# Altium PCB base-board_v0.PcbDoc (part 1 of 3)
Units mm, origin at the board's own origin, x right, y up, seen from the top; angles counter-clockwise.
Board outline 82.49 x 71.25 mm, 4 copper layers (1 Top Layer, 2 Signal Layer, 3 GND Layer, 4 Bottom Layer), stack 1.57 mm thick; 189 components, 152 nets, 678 pads, 239 vias.
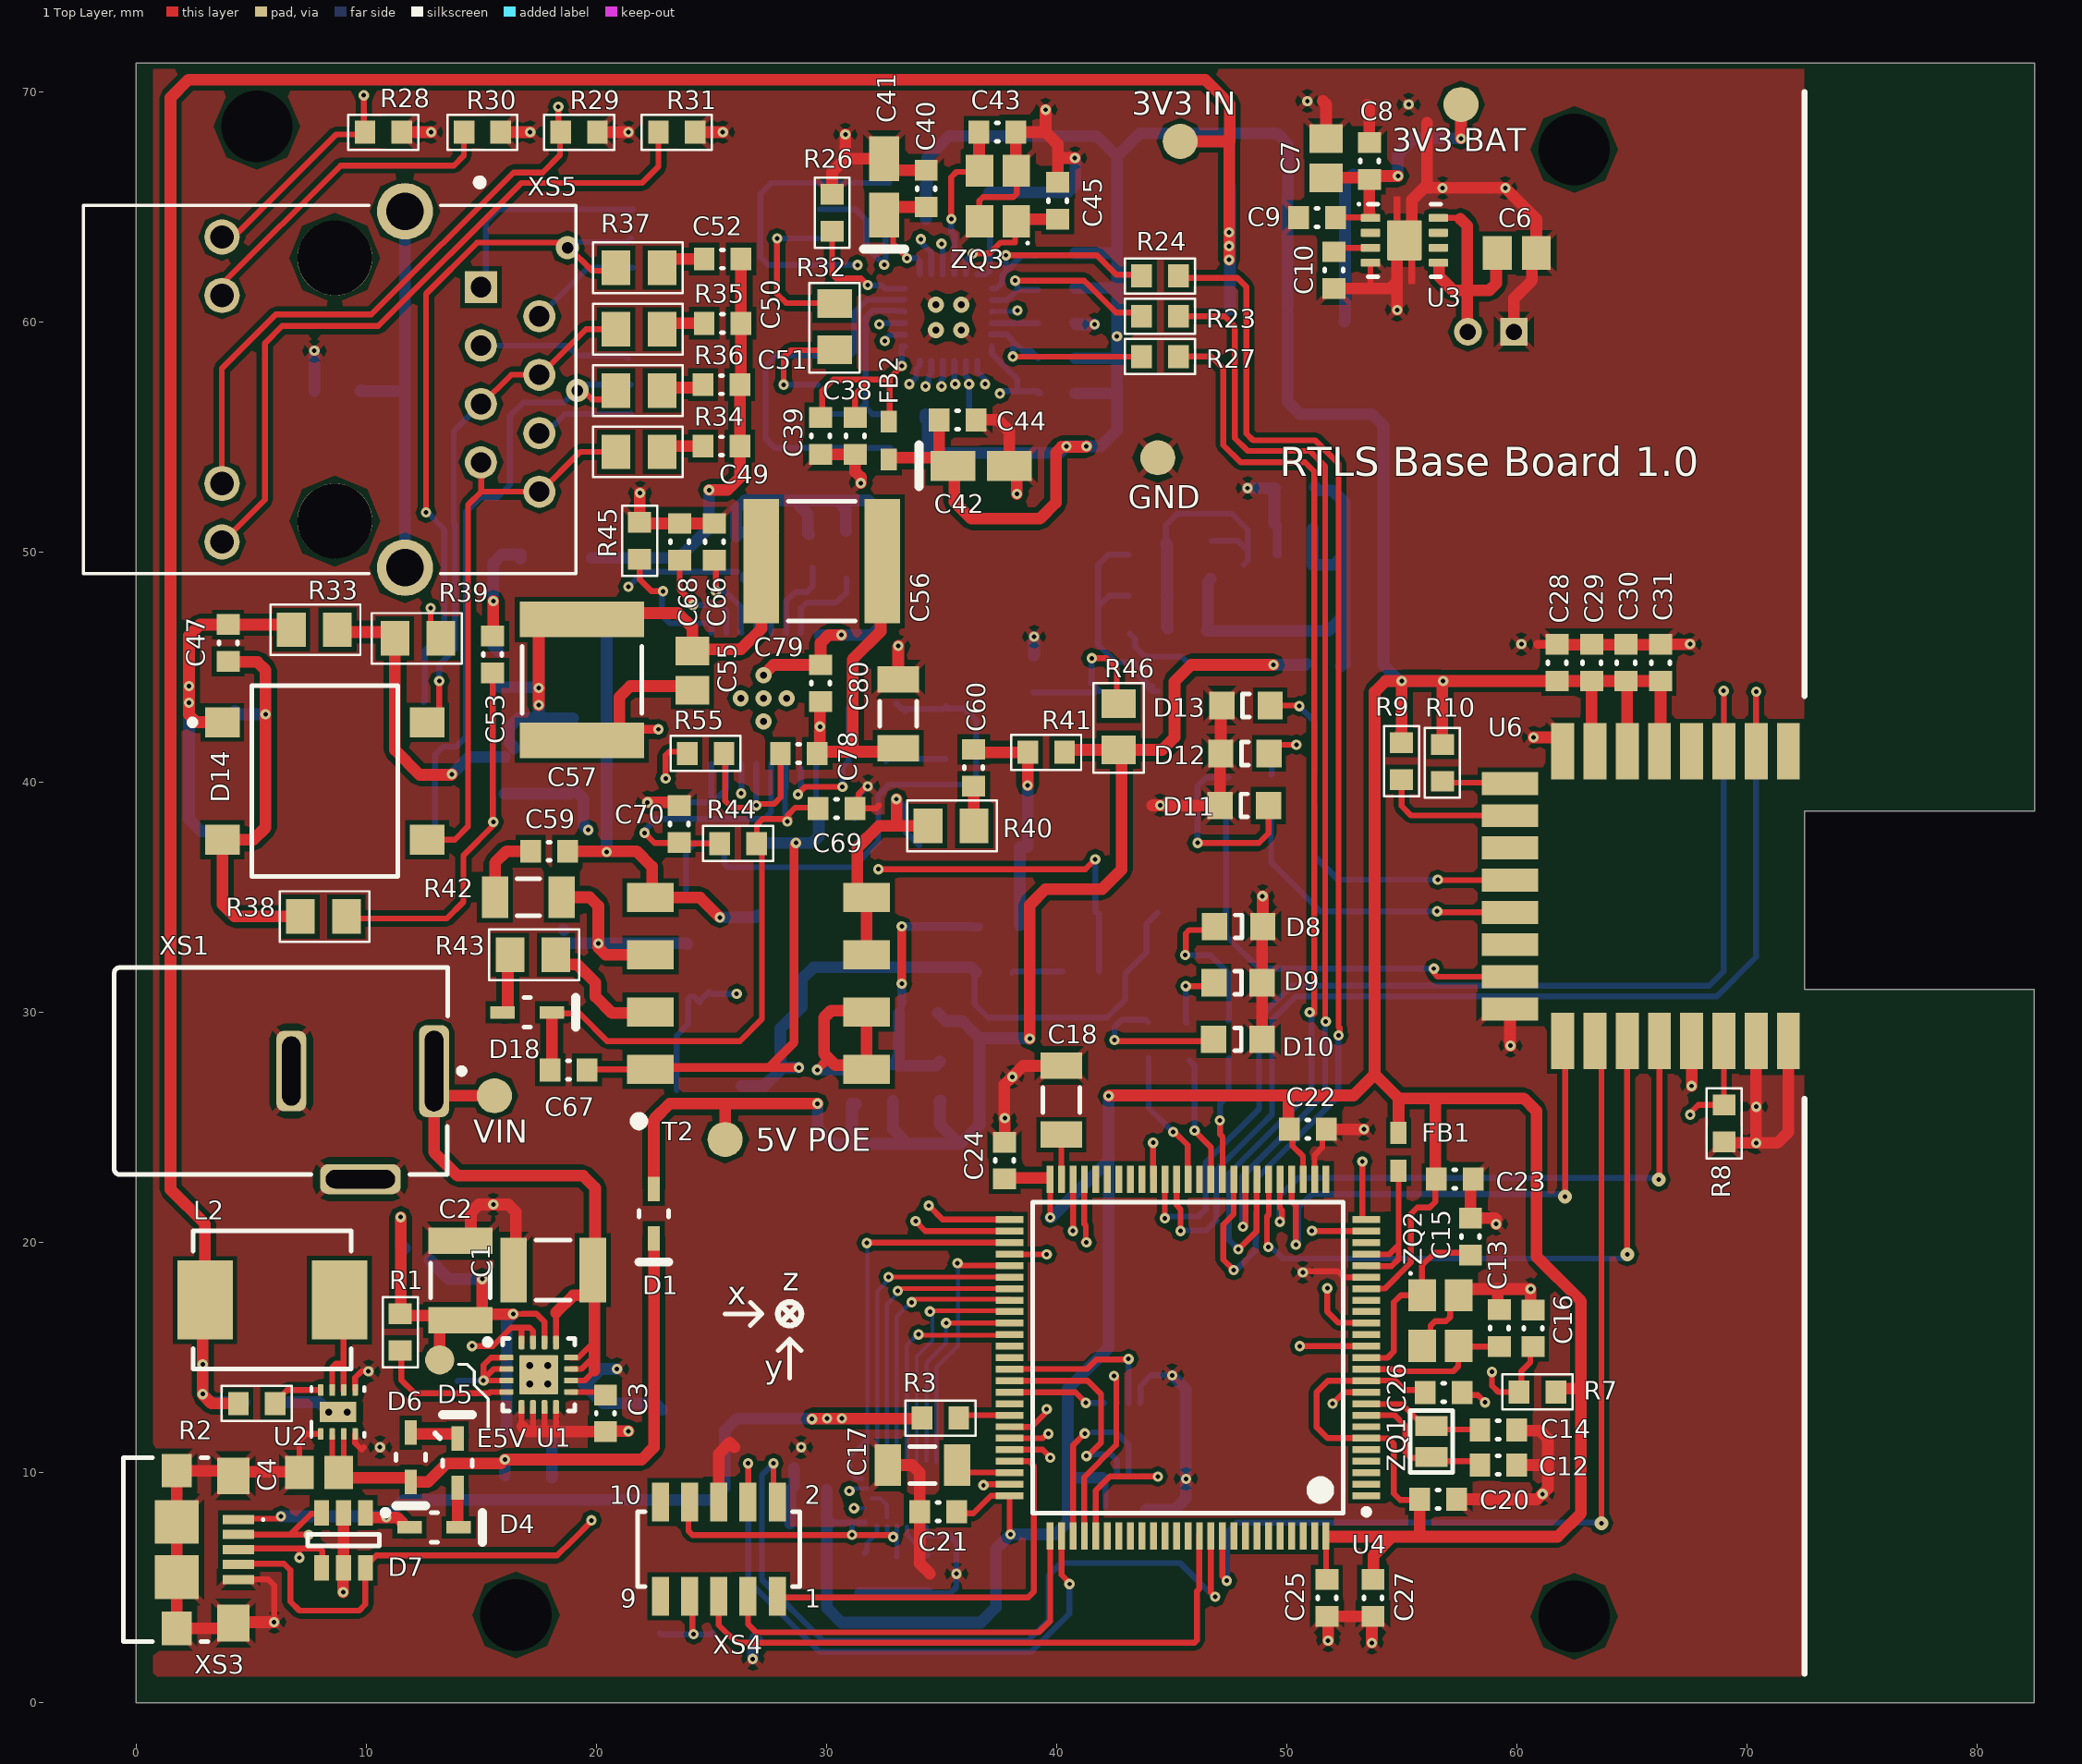
[diagram p0: 1 Top Layer view]
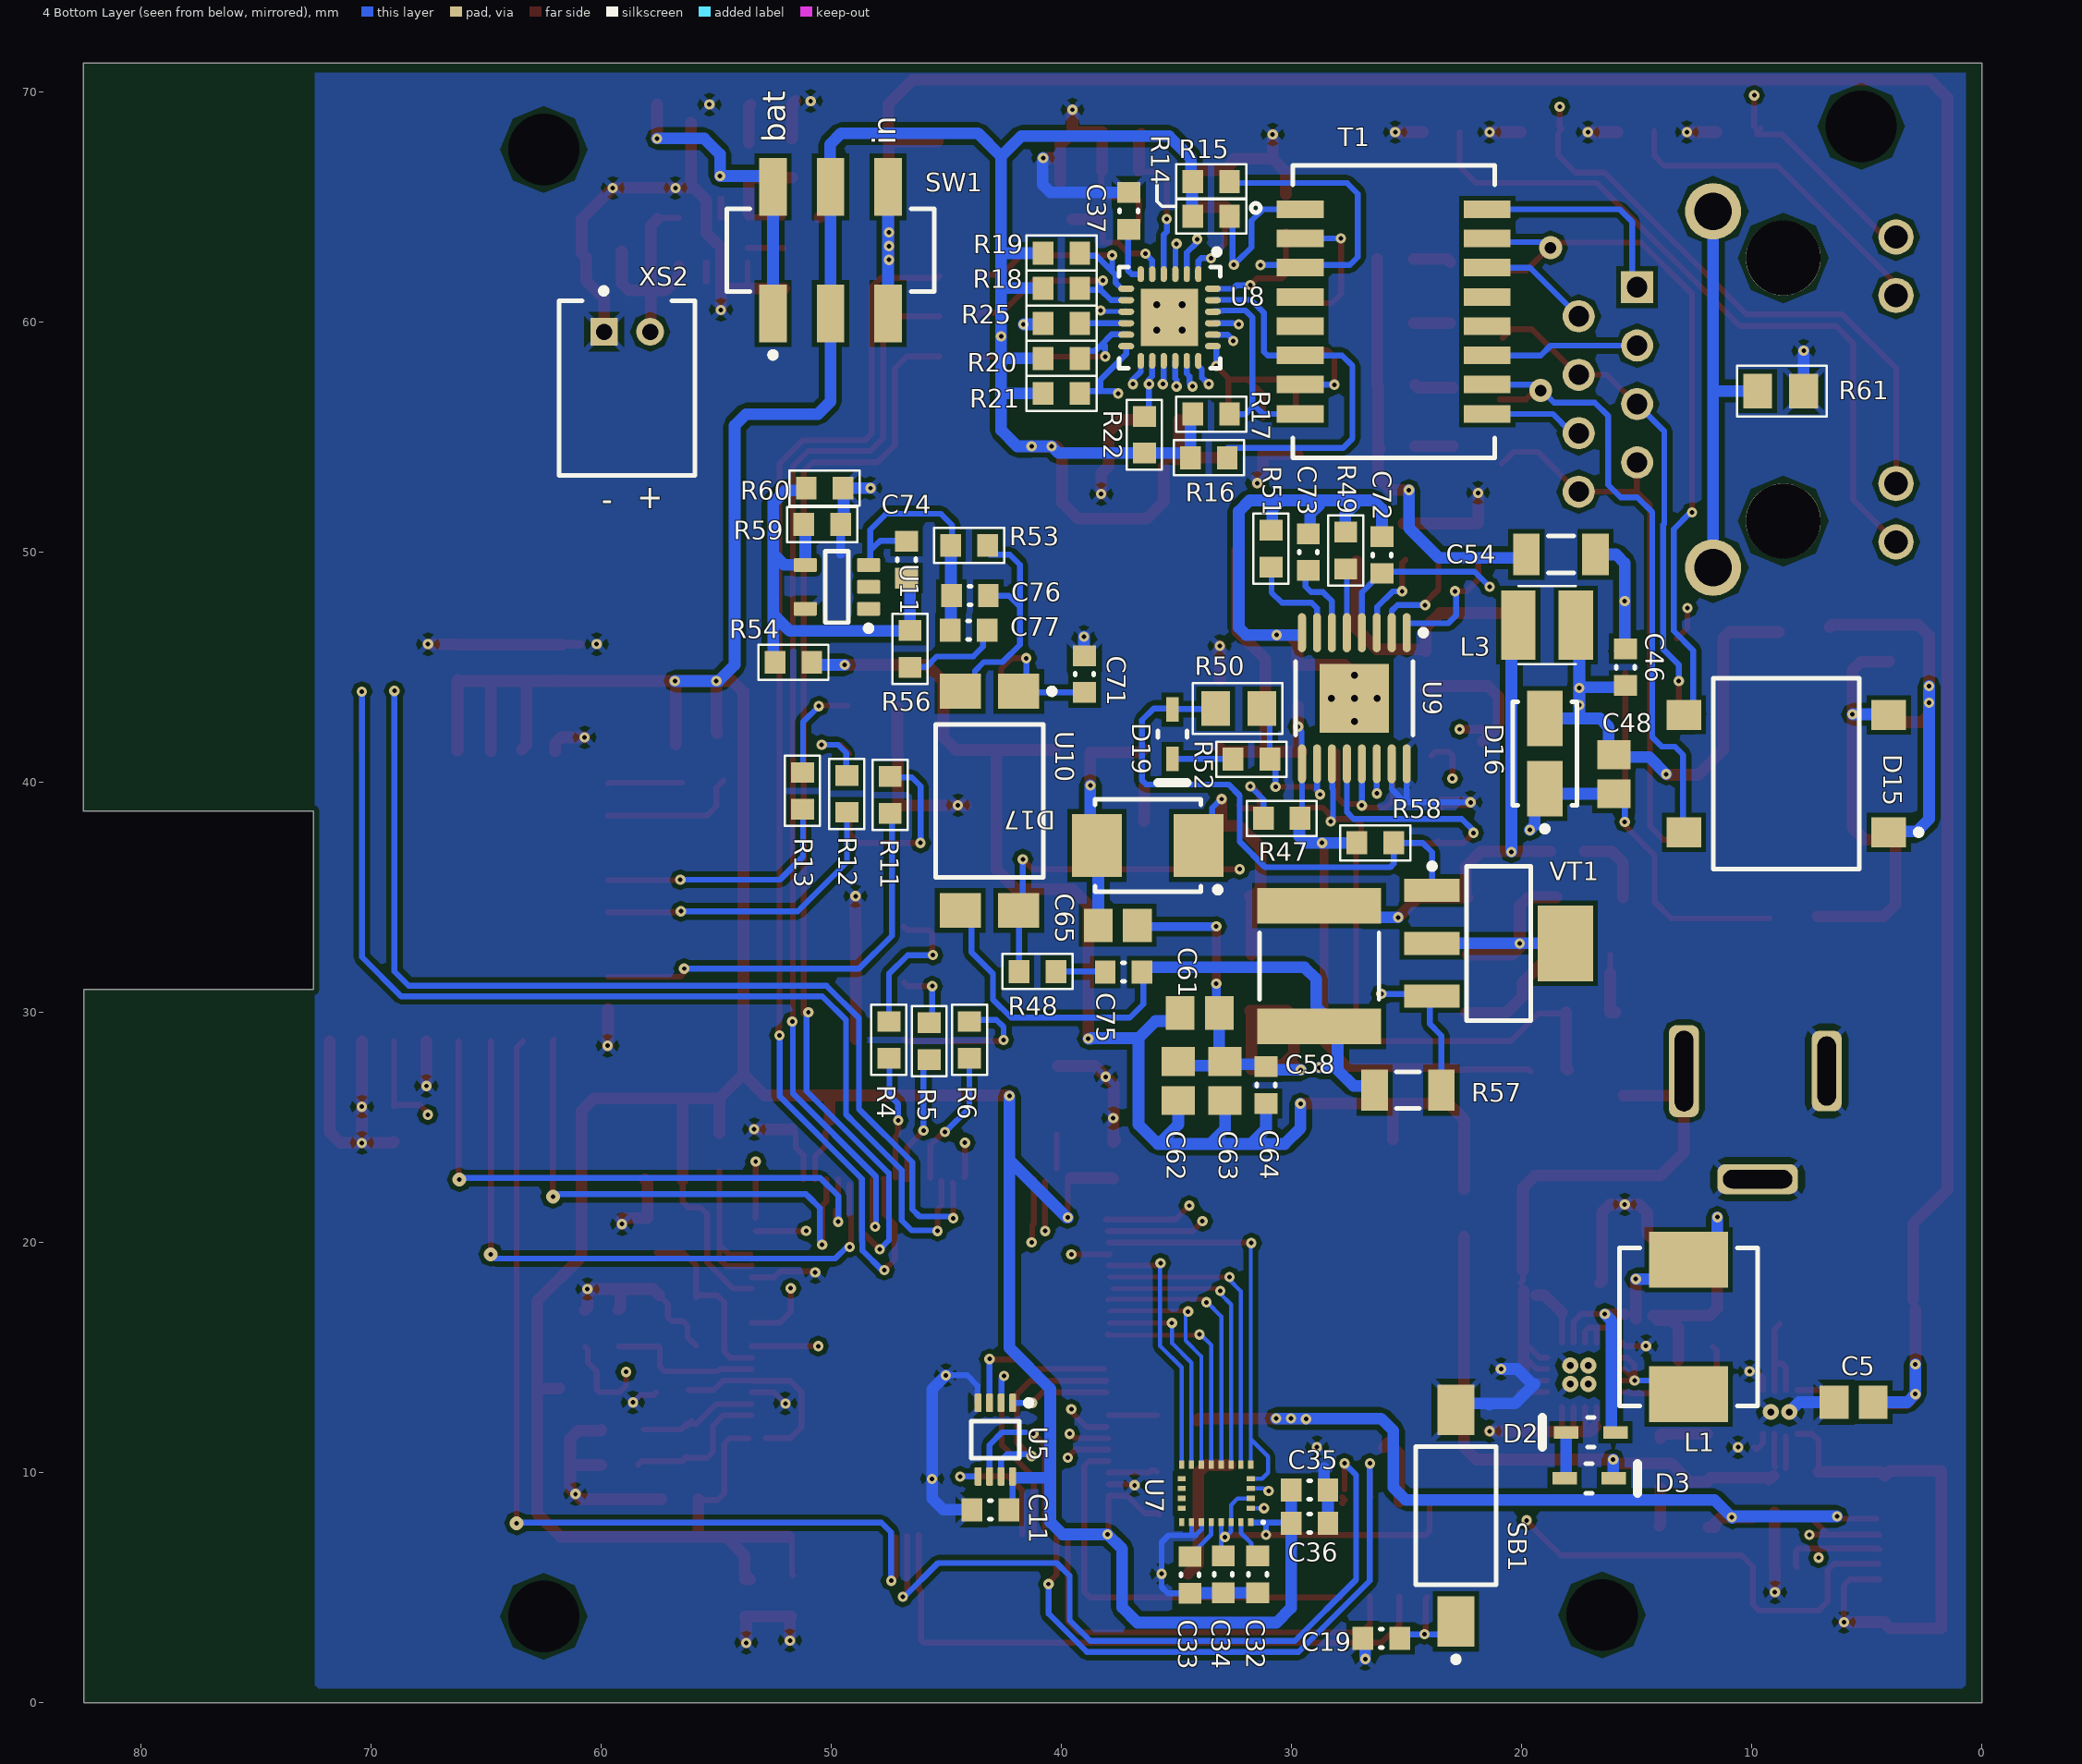
[diagram p1: 4 Bottom Layer view, seen from below]
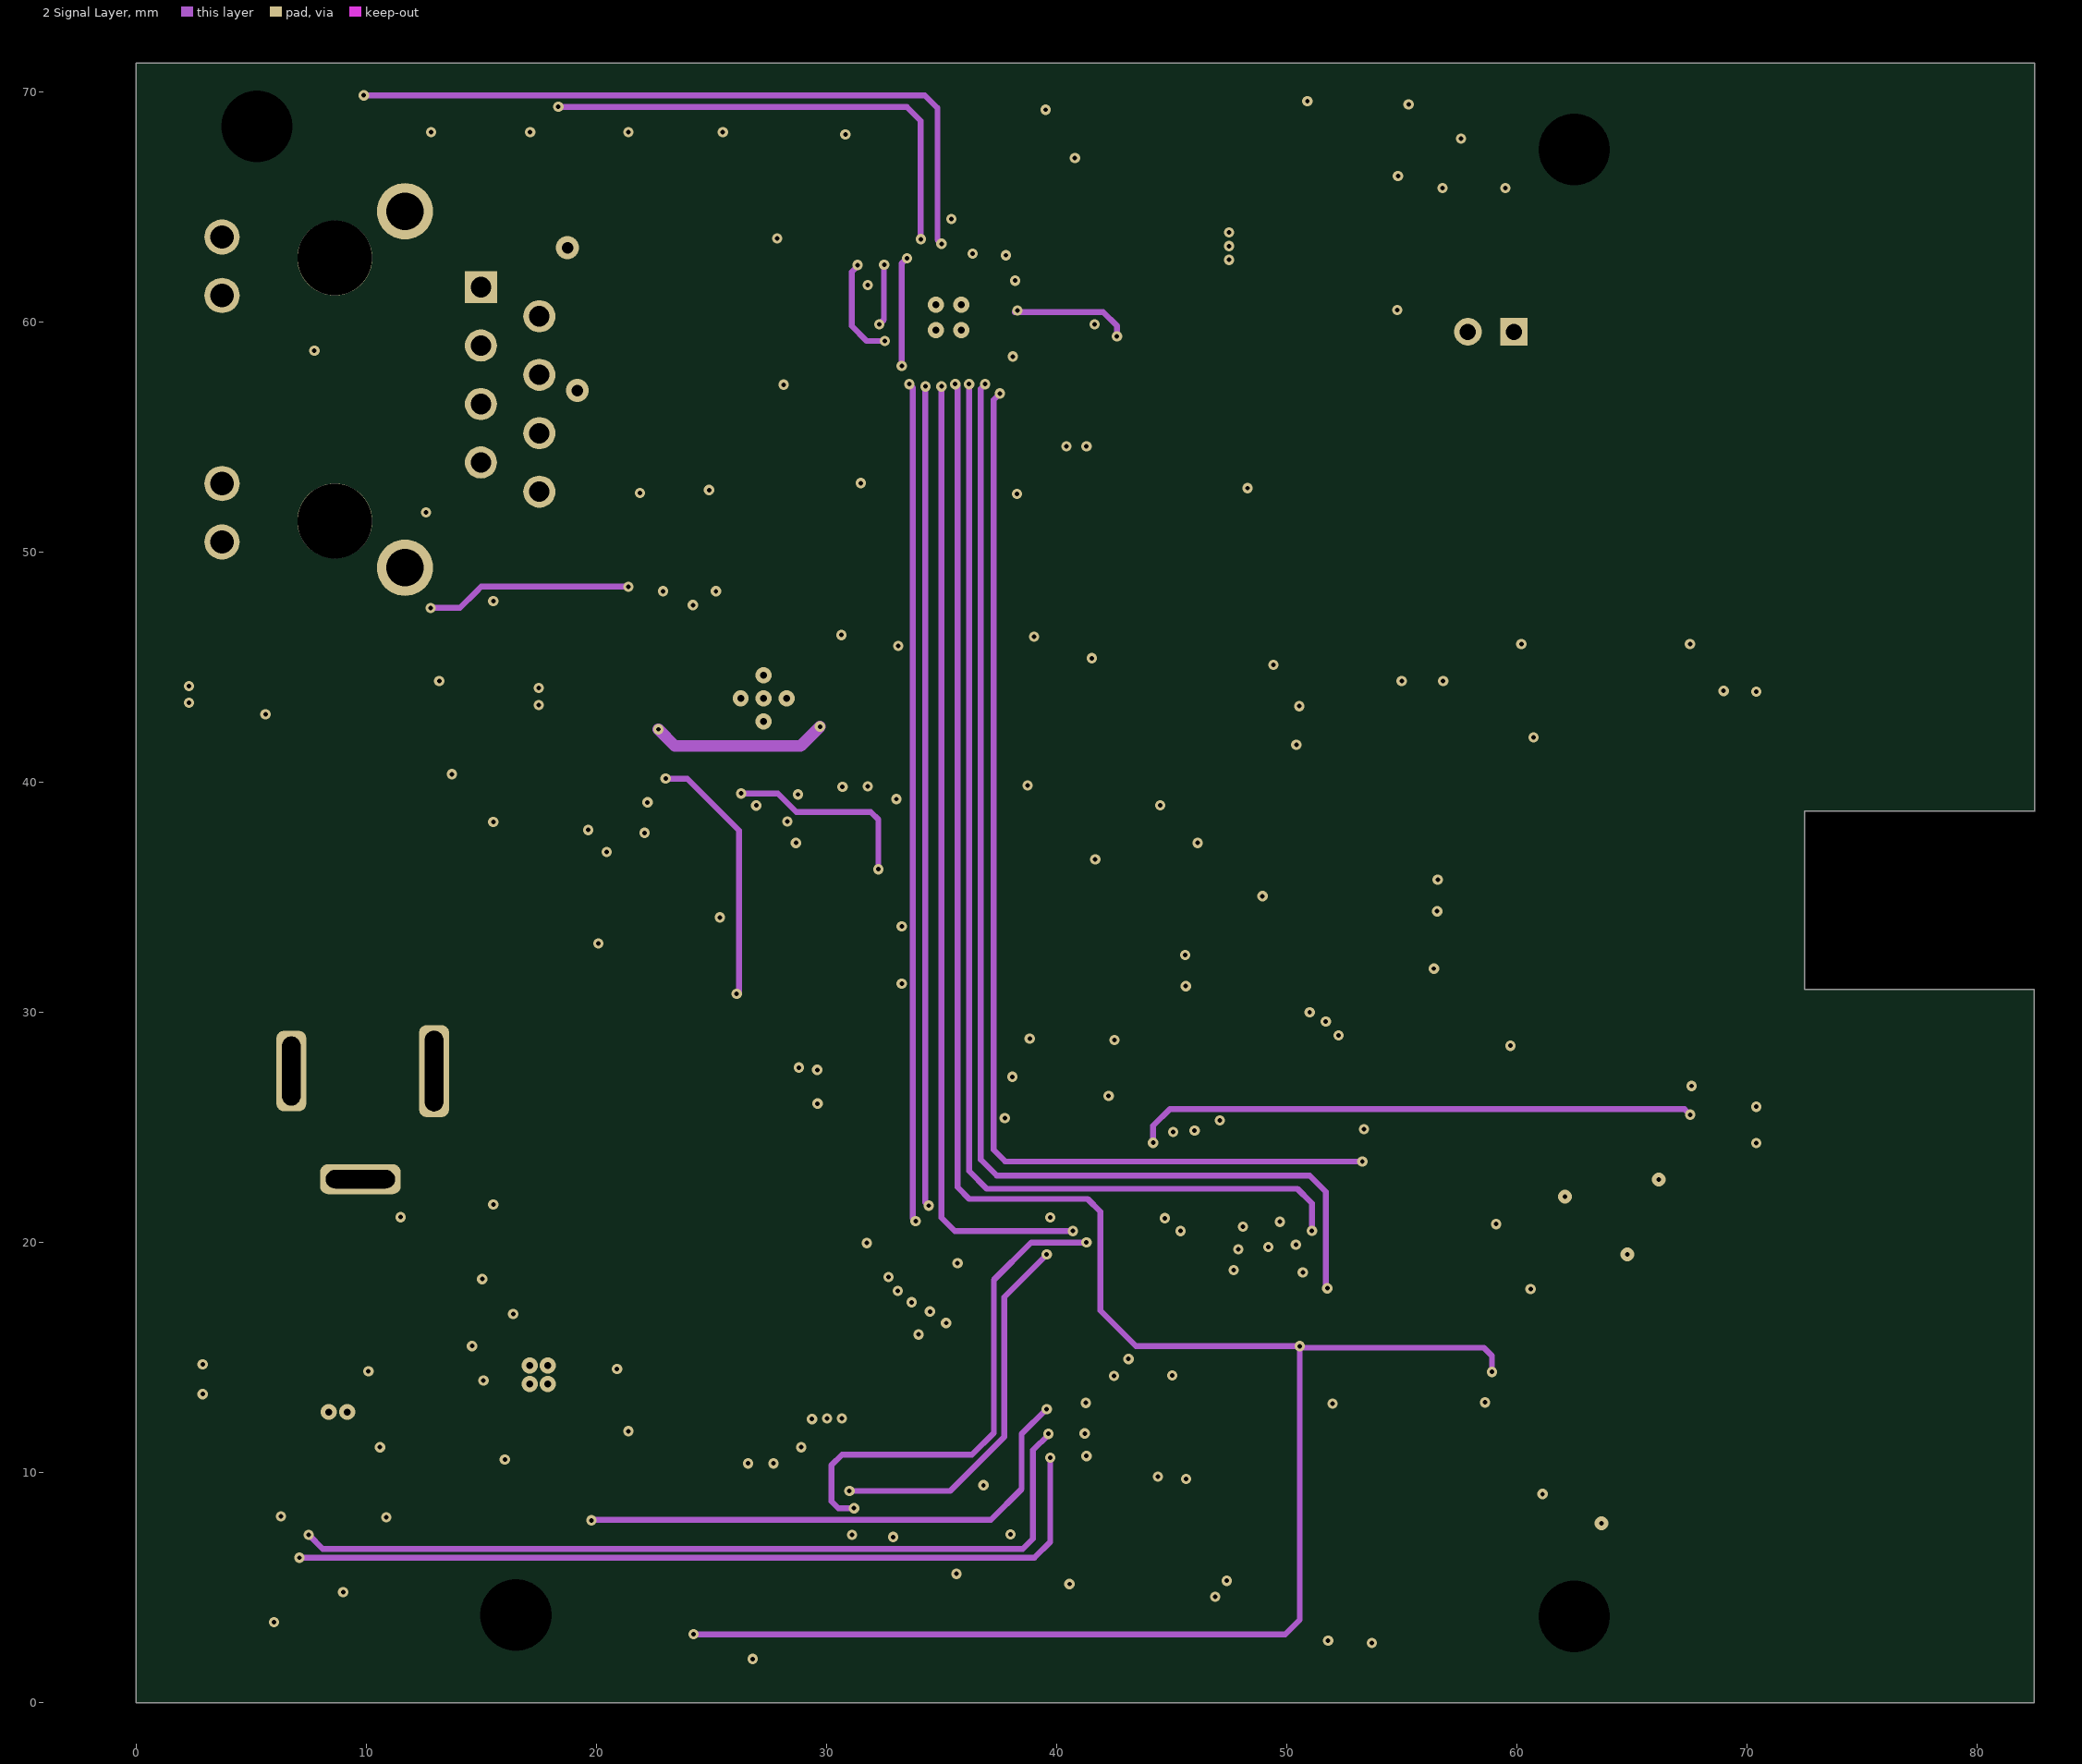
[diagram p2: 2 Signal Layer]
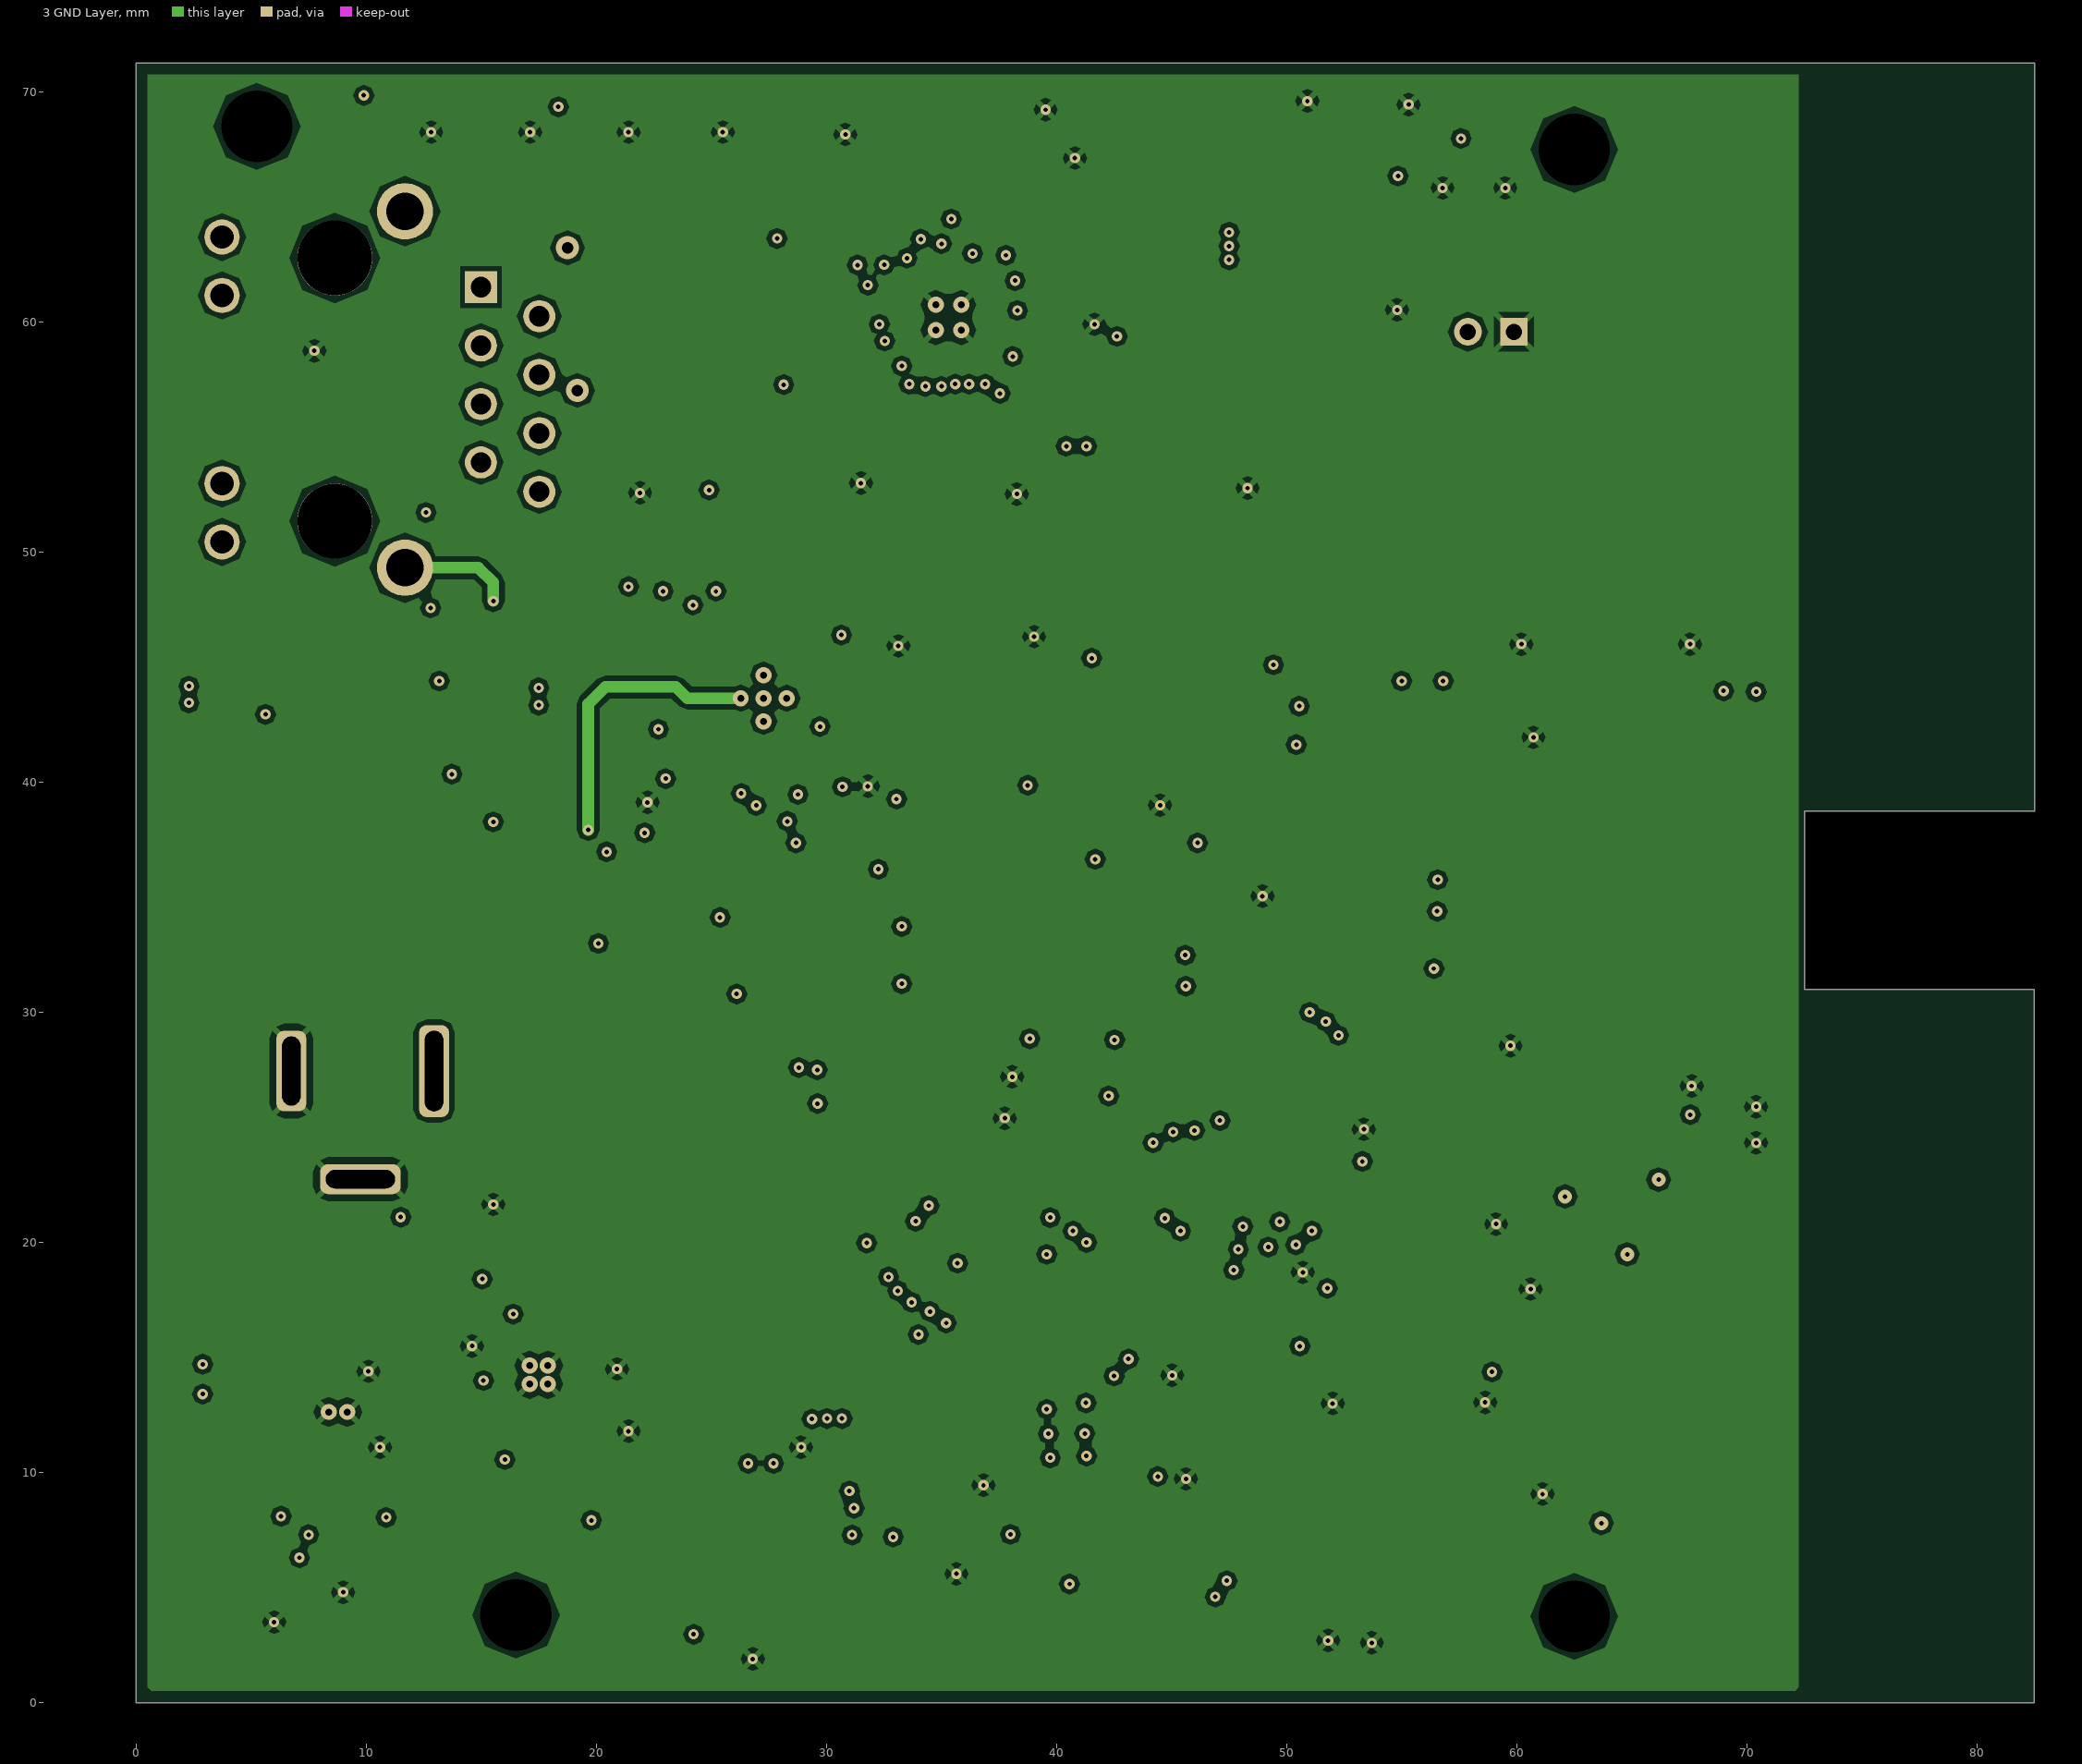
[diagram p3: 3 GND Layer]

## Layer stack, top to bottom
Top Solder: solder mask 0.015, Solder Resist, Dk 3.8
1 Top Layer: signal copper 0.035
Dielectric 1: prepreg 0.1, 2313, Dk 4.05
2 Signal Layer: signal copper 0.0175
Dielectric 3: core 1.265, FR-4, Dk 4.2
3 GND Layer: signal copper 0.0175
Dielectric 2: prepreg 0.1, 2313, Dk 4.05
4 Bottom Layer: signal copper 0.035
Bottom Solder: solder mask 0.015, Solder Resist, Dk 3.8

## Board outline
0.01,0 0.01,71.25 82.5,71.25 82.5,38.75 72.5,38.75 72.5,31 82.49,31 82.49,0

## Design rules (kind name [scope] priority, off if disabled: settings)
BoardOutlineClearance [All] p1: gap=0.25 ignorepadtopadclearanceinfootprint=FALSE
Clearance "Clearance Bottom Layer" [OnLayer('Bottom Layer')] p1: gap=0.203 ignorepadtopadclearanceinfootprint=TRUE except(0.254: Arc-Text Track-Text SMDPad-Text THPad-Text Via-Text Fill-Text Poly-Text Region-Text Text-Text)
Clearance "Clearance Top Layer" [OnLayer('Top Layer')] p2: gap=0.203 ignorepadtopadclearanceinfootprint=TRUE except(0.254: Arc-Text Track-Text SMDPad-Text THPad-Text Via-Text Fill-Text Poly-Text Region-Text Text-Text)
Clearance [All] p3: gap=0.2 ignorepadtopadclearanceinfootprint=FALSE except(0.089: Arc-Arc Arc-Track Arc-SMDPad Track-Track Track-SMDPad SMDPad-SMDPad; 0.127: Arc-Via Track-Via SMDPad-Via THPad-Via Via-Via; 0.254: Arc-Text Track-Text SMDPad-Text THPad-Text Via-Text Fill-Text Poly-Text Region-Text Text-Text)
ComponentClearance [All] p1: gap=0 collisioncheckmode=3 verticalgap=0.254 showdistances=FALSE
DiffPairsRouting [All] p1: maxlimit=2.54 minlimit=0.089 mostfreqgap=0.127 toplayer_minwidth=0.089 toplayer_maxwidth=0.508 toplayer_prefwidth=0.254 midlayer1_minwidth=0.089 midlayer1_maxwidth=0.508 midlayer1_prefwidth=0.254 midlayer2_minwidth=0.089 midlayer2_maxwidth=0.508 midlayer2_prefwidth=0.254 bottomlayer_minwidth=0.089 bottomlayer_maxwidth=0.508 bottomlayer_prefwidth=0.254 maxuncoupledlength=12.7
HoleSize [All] p1: absolutevalues=TRUE maxlimit=6.3 minlimit=0.2 maxpercent=80.000 minpercent=20.000
HoleToHoleClearance [All] p1: gap=0.2 allowstackedmicrovias=TRUE
MatchedLengths DiffPair_MatchedLengths [InDifferentialPair ('TX')] p1: tolerance=25.4 checknetsindiffpair=FALSE checkdiffpairvsdiffpair=TRUE checkxsignals=TRUE checkothers=TRUE
MinimumAnnularRing [All] p1: minimumring=0.076
MinimumSolderMaskSliver [All] p1: minsoldermaskwidth=0
PolygonConnect [All] p1: connectstyle=Relief reliefconductorwidth=0.254 reliefentries=4 polygonreliefangle="45 Angle" airgapwidth=0.254
RoutingVias [All] p1: holewidth=0.2 width=0.45 viastyle="Through Hole" minholewidth=0.2 minwidth=0.45 maxholewidth=0.5 maxwidth=1
SilkToSilkClearance [All] p1: silktosilkclearance=0
SilkToSolderMaskClearance [IsPad] p1: minsilkscreentomaskgap=0 clearancetoexposedcopper=TRUE
SolderMaskExpansion [All] p1: expansion=0.102
Width [All] p1: maxlimit=2.54 minlimit=0.089 preferedwidth=0.381
23 further rules are at their usual default settings.

## Classes and differential pairs
component class dwm: C28 C29 C30 C31 D11 D12 D13 R8 R9 R10 R11 R12 R13 U6
component class Ethernet: C37 C38 C39 C40 C41 C42 C43 C44 C45 C46 C47 C48 C49 C50 C51 C52 C53 C54 C55 C56 C57 C58 C59 C60 C61 C62 C63 C64 C65 C66 C67 C68 C69 C70 C71 C72 C73 C74 C75 C76 C77 C78 C79 C80 D14 D15 D16 D17 D18 D19 FB2 L3 R14 R15 R16 R17 R18 R19 R20 R21 R22 R23 R24 R25 R26 R27 R28 R29 R30 R31 R32 R33 R34 R35 R36 R37 R38 R39 R40 R41 R42 R43 R44 R45 R46 R47 R48 R49 R50 R51 R52 R53 R54 R55 R56 R57 R58 R59 R60 R61 T1 T2 T3 U8 U9 U10 U11 VT1 XS5 ZQ3
component class IMU: C32 C33 C34 C35 C36 U7
component class base-board: C1 C2 C3 C4 C5 C6 C7 C8 C9 C10 D1 D2 D3 D4 D5 D6 L1 L2 R1 R2 SW1 U1 U2 U3 XS1 XS2
component class MCU: C11 C12 C13 C14 C15 C16 C17 C18 C19 C20 C21 C22 C23 C24 C25 C26 C27 D7 D8 D9 D10 FB1 R3 R4 R5 R6 R7 SB1 U4 U5 XS3 XS4 ZQ1 ZQ2
differential pair TD: +TD_P -TD_N
differential pair TX: +TX_P -TX_N
differential pair RX: +RX_P -RX_N
differential pair RD: +RD_P -RD_N
differential pair USB_D: +USB_D_P -USB_D_N

## Components (designator, comment, footprint, x,y, rotation, side; value= is the part's Value field where it differs from the comment)
C1 "C1210" C1210 16.4,18.8 r0 top value=10u
C2 "C1210" C1210 14.1,20.075 r270 top value=22u
C3 "C0603" C0603 20.4,11.775 r90 top value=3.3n
C4 "C0805" C0805 7.1,10 r0 top value=10u
C5 "C0805" C0805 6.426,13.056 r180 bottom value=22uF
C6 "C0805" C0805 60.85,63 r180 top value=1u
C7 "C0805" C0805 51.714,67.969 r270 top value=1000p
C8 "C0603" C0603 53.594,67.792 r270 top value=0.1u
C9 "C0603" C0603 50.521,64.541 r0 top value=10u
C10 "C0603" C0603 52.05,61.45 r90 top value=0.01u
C11 "C0603" C0603 43.891,8.382 r180 bottom value=100nF
C12 "C0603" C0603 60,10.325 r180 top value=12p
C13 "C0603" C0603 59.242,15.476 r90 top value=12p
C14 "C0603" C0603 60,11.85 r180 top value=12p
C15 "C0603" C0603 57.988,19.456 r90 top value=12p
C16 "C0603" C0603 60.706,17.069 r270 top value=100nF
C17 "C1206" C1206(3216) 32.674,10.326 r0 top value=2.2uF
C18 "C1206" C1206(3216) 40.208,27.689 r270 top value=2.2uF
C19 "C0603" C0603 26.898,2.794 r180 bottom value=100nF
C20 "C0603" C0603 57.378,8.839 r180 top value=100nF
C21 "C0603" C0603 34.061,8.306 r0 top value=100nF
C22 "C0603" C0603 51.725,24.925 r180 top value=100nF
C23 "C0603" C0603 58.1,22.75 r180 top value=100nF
C24 "C0603" C0603 37.744,24.359 r270 top value=100nF
C25 "C0603" C0603 51.75,3.75 r90 top value=100nF
C26 "C0603" C0603 57.625,13.475 r180 top value=100nF
C27 "C0603" C0603 53.75,5.35 r270 top value=4.7uF
C28 "C0603" C0603 61.75,44.4 r90 top value=1uF
C29 "C0603" C0603 63.25,44.4 r90 top value=100nF
C30 "C0603" C0603 64.75,44.4 r90 top value=100nF
C31 "C0603" C0603 66.25,44.4 r90 top value=100nF
C32 "C0603" C0603 31.471,6.375 r270 bottom value=100nF
C33 "C0603" C0603 34.417,4.75 r90 bottom value=10nF
C34 "C0603" C0603 32.969,6.375 r270 bottom value=1uF
C35 "C0603" C0603 30.023,9.246 r180 bottom value=100nF
C36 "C0603" C0603 30.023,7.798 r180 bottom value=100nF
C37 "C0603" C0603 37.075,64.025 r90 bottom value=470pF
C38 "C0603" C0603 31.25,55.85 r270 top value=1uF
C39 "C0603" C0603 29.75,55.85 r270 top value=100nF
C40 "C0603" C0603 34.336,65 r90 top value=100nF
C41 "TPSA106K010R0900" TPSA106K010R1800 32.512,64.643 r90 top value=10uF
C42 "TPSA106K010R0900" TPSA106K010R1800 35.5,53.75 r0 top value=10uF
C43 "C0603" C0603 36.625,68.25 r0 top value=12p
C44 "C0603" C0603 34.9,55.75 r0 top value=100nF
C45 "C0603" C0603 40.056,64.465 r90 top value=12p
C46 "C0603" C0603 15.5,45.8 r270 bottom value=1nF
C47 "C0603" C0603 4,45.25 r90 top value=1nF
C48 "C0805" C0805 16.002,39.497 r90 bottom value=100nF
C49 "C0603" C0603 26.238,54.61 r180 top value=1nF
C50 "C0603" C0603 26.289,59.944 r180 top value=1nF
C51 "C0603" C0603 26.238,57.277 r180 top value=1nF
C52 "C0603" C0603 26.289,62.738 r180 top value=1nF
C53 "C0603" C0603 15.5,44.75 r90 top value=1nF
C54 "C1206" C1206(3216) 16.8,49.9 r0 bottom value=1nF
C55 "C0805" C0805 24.175,44 r90 top value=100nF
C56 "C2220" C2220 32.425,49.6 r180 top value=4.7uF
C57 "C2220" C2220 19.375,41.825 r90 top value=4.7uF
C58 "C2220" C2220 28.804,34.638 r270 bottom value=4.7uF
C59 "C0603" C0603 17.15,37 r0 top value=27pF
C60 "C0603" C0603 36.398,41.427 r270 top value=560pF
C61 "C0805" C0805 33.147,29.972 r0 bottom value=47uF
C62 "C0805" C0805 34.925,27.862 r270 bottom value=47uF
C63 "C0805" C0805 32.893,27.862 r270 bottom value=47uF
C64 "C0603" C0603 31.115,26.035 r90 bottom value=100nF
C65 "C0805" C0805 36.703,33.782 r0 bottom value=47uF
C66 "C0603" C0603 25.131,49.646 r90 top value=10nF
C67 "C0603" C0603 19.6,27.5 r180 top value=1uF
C68 "C0603" C0603 23.631,49.646 r90 top value=100nF
C69 "C0603" C0603 31.242,38.862 r180 top value=100nF
C70 "C0603" C0603 23.597,38.989 r270 top value=100nF
C71 "C0603" C0603 39,43.9 r90 bottom value=1uF
C72 "C0603" C0603 26.075,50.675 r270 bottom value=1nF
C73 "C0603" C0603 29.275,50.8 r270 bottom value=10nF
C74 "C0603" C0603 46.736,48.87 r90 bottom value=100pF
C75 "C0603" C0603 36.5,31.75 r0 bottom value=100nF
C76 "C0603" C0603 44.78,48.108 r180 bottom value=10nF
C77 "C0603" C0603 44.831,46.609 r180 bottom value=22nF
C78 "C0603" C0603 29.6,41.25 r180 top value=470pF
C79 "C0603" C0603 29.75,43.5 r90 top value=1nF
C80 "C1206" C1206(3216) 33.122,41.475 r90 top value=1nF
D1 "BAT60A" SOD-323-2 22.5,21.25 r270 top
D2 "BAT60A" SOD-323-2 17,11.75 r0 bottom
D3 "BAT60A" SOD-323-2 17.07,9.75 r180 bottom
D4 "BAT60A" SOD-323-2 12.954,7.62 r0 top
D5 "BAT60A" SOD-323-2 13.97,10.414 r90 top
D6 "BAT60A" SOD-323-2 11.938,10.668 r270 top
D7 "ESDA6V1BC6" SOT-23-6 9.017,7.055 r270 top
D8 "LED0805" LED0805 47.911,33.729 r180 top
D9 "LED0805" LED0805 47.888,31.293 r180 top
D10 "LED0805" LED0805 47.879,28.829 r180 top
D11 "LED0805" LED0805 48.158,38.989 r0 top
D12 "LED0805" LED0805 48.184,41.25 r0 top
D13 "LED0805" LED0805 48.235,43.332 r0 top
D14 "DF01S" SDIP-4 3.75,42.6 r270 top
D15 "DF01S" SDIP-4 4.054,37.826 r90 bottom
D16 "SMAJ58A" DO-214AC-2_N 19,41.25 r90 bottom
D17 "STPS2L40U" SMB-2 36.25,37.25 r0 bottom
D18 "BAT46J" SOD-323-2 17,30 r0 top
D19 "BAT46J" SOD-323-2 35.179,42.088 r270 bottom
FB1 "BLM18PG121SN1D" BLM18 54.864,23.114 r90 top
FB2 "BLM18PG121SN1D" BLM18 32.715,55.676 r270 top
L1 "IND 2.2u 2220" IND2220 12.75,13.408 r90 bottom value=2.2u
L2 "IND 2.2u 2220" IND2220 8.842,17.5 r180 top value=2.2u
L3 "ME3220" ME3220 20.15,46.825 r180 bottom
R1 "R0603" SMD0603 11.481,16.104 r90 top value=100k
R2 "R0603" SMD0603 5.25,13 r180 top value=100k
R3 "10K" SMD0603 34.95,12.37 r0 top value=10ê
R4 "1K" SMD0603 47.5,28.8 r270 bottom
R5 "1K" SMD0603 45.75,28.75 r270 bottom
R6 "1K" SMD0603 44,28.8 r270 bottom
R7 "4.7K" SMD0603 60.9,13.5 r0 top value=10ê
R8 "10K" SMD0603 69.012,25.171 r90 top value=1K
R9 "R0603" SMD0603 54.991,40.919 r90 top value=10K
R10 "R0603" SMD0603 56.769,40.843 r90 top value=10K
R11 "1K" SMD0603 47.447,39.446 r270 bottom
R12 "1K" SMD0603 49.327,39.497 r270 bottom
R13 "1K" SMD0603 51.257,39.624 r270 bottom
R14 "R0603" SMD0603 33.5,64.6 r0 bottom value=50
R15 "R0603" SMD0603 33.5,66.1 r0 bottom value=50
R16 "R0603" SMD0603 33.6,54.1 r0 bottom value=50
R17 "R0603" SMD0603 33.5,56 r0 bottom value=50
R18 "R0603" SMD0603 40.005,61.468 r0 bottom value=10K
R19 "R0603" SMD0603 40.005,62.992 r0 bottom value=10K
R20 "R0603" SMD0603 40.005,58.42 r0 bottom value=10K
R21 "R0603" SMD0603 40.005,56.896 r0 bottom value=10K
R22 "R0603" SMD0603 36.4,55.1 r270 bottom value=10K
R23 "R0603" SMD0603 44.5,60.25 r0 top value=33
R24 "R0603" SMD0603 44.5,62 r0 top value=33
R25 "R0603" SMD0603 40.005,59.944 r180 bottom value=10K
R26 "R0603" SMD0603 30.25,64.75 r270 top value=12K1
R27 "R0603" SMD0603 44.5,58.5 r0 top value=33
R28 "R0603" SMD0603 10.75,68.25 r180 top value=10K
R29 "R0603" SMD0603 19.25,68.25 r180 top value=10K
R30 "R0603" SMD0603 15.05,68.25 r180 top value=330
R31 "R0603" SMD0603 23.5,68.25 r180 top value=330
R32 "R0805" SMD0805 30.353,60.801 r270 top value=0
R33 "R0805" SMD0805 6.75,46.625 r0 top value=0
R34 "R0805" SMD0805 22.86,54.356 r180 top value=75
R35 "R0805" SMD0805 22.86,59.69 r180 top value=75
R36 "R0805" SMD0805 22.86,57.023 r180 top value=75
R37 "R0805" SMD0805 22.86,62.357 r180 top value=75
R38 "R0805" SMD0805 7.144,34.163 r0 top value=0
R39 "R0805" SMD0805 13.25,46.25 r180 top value=10
R40 "R0805" SMD0805 34.417,38.1 r0 top value=15
R41 "R0603" SMD0603 39.548,41.3 r0 top value=0
R42 "R1206" R1206(3216) 17.05,35 r0 top value=200
R43 "R0805" SMD0805 16.25,32.5 r0 top value=68
R44 "R0603" SMD0603 26.162,37.338 r180 top value=10K
R45 "R0603" SMD0603 21.881,50.496 r90 top value=124K
R46 "R0805" SMD0805 42.697,43.409 r270 top value=0
R47 "R0603" SMD0603 30.429,38.43 r0 bottom value=0
R48 "R0603" SMD0603 41.046,31.775 r0 bottom value=1K
R49 "R0603" SMD0603 27.65,50.075 r270 bottom value=2K
R50 "R0805" SMD0805 31.3,43.2 r0 bottom value=56
R51 "R0603" SMD0603 30.9,50.15 r270 bottom value=75K
R52 "R0603" SMD0603 31.75,41 r0 bottom value=0
R53 "R0603" SMD0603 44.018,50.292 r180 bottom value=1K
R54 "R0603" SMD0603 51.651,45.212 r0 bottom value=20K
R55 "R0603" SMD0603 24.75,41.25 r180 top value=510
R56 "R0603" SMD0603 46.584,45.796 r270 bottom value=10K
R57 "R1206" R1206(3216) 24.943,26.619 r180 bottom value=0.47
R58 "R0603" SMD0603 26.365,37.363 r180 bottom value=10K
R59 "R0603" SMD0603 50.4,51.2 r180 bottom value=13K
R60 "R0603" SMD0603 50.292,52.781 r180 bottom value=13K
R61 "R0805" SMD0805 9.75,57 r180 bottom value=0
SB1 "FSMSM" FSMSM-2 22.86,8.128 r90 bottom
SW1 "JS202011SCQN" JS202011SCQN 50.038,63.119 r180 bottom
T1 "H2019NL" H2019NL 25.562,60.455 r180 bottom
T2 "POE30P-50L" POE30P 22.352,27.522 r0 top
U1 "TPS62143" QFN-16 17.5,14.25 r0 top
U2 "TPS62162" SON-8 8.775,12.634 r90 top
U3 "TPS73633DRBR" VSON-8 55.118,63.551 r0 top
U4 "STM32F207VET6" STM-LQFP100_V 53.462,8.993 r180 top
U5 "MX25L1606EMI-12G" SOP-8 42.875,11.43 r270 bottom
U6 "DWM1000" DWM1000 59.5,41.545 r270 top
U7 "LSM9DS1" STM-LGA-24_3500X3000X1000 33.278,9.092 r0 bottom
U8 "LAN8742A" QFN-24 35.306,60.198 r270 bottom
U9 "PM8800A" HTSSOP16 27.275,43.65 r270 bottom
U10 "SFH6156" SFH6156(VISH) 43.129,39.192 r270 bottom
U11 "TS431" SOT-23-5 49.759,48.489 r0 bottom
VT1 "STN4NF20L" SOT-223 21,33 r180 bottom
XS1 "PowerJack" PowerJack 6.75,27.45 r180 top
XS2 "S2B-PH-K-S" S2B-PH-K-S 58.875,57.125 r180 bottom
XS3 "TE-1981568" TECO-1981568-5_V 4.449,6.655 r270 top
XS4 "PLD1.27-10S" PLD1.27-10S 27.864,4.623 r180 top
XS5 "HR911105A" HR911105A 14.986,61.517 r270 top
ZQ1 "32.768kHz" DST210A 56.289,11.35 r270 top
ZQ2 "12 MHz" NX3225 56.683,16.605 r270 top
ZQ3 "12 MHz" NX3225 37.45,65.475 r90 top

## Footprints (in the part's own frame and the unit in brackets; to place one, negate y for a bottom-side part, rotate by r counter-clockwise, add the part's x,y. Pads: shape width x height; smd on the part's side, far side on the other; paste and mask are expansions set on the pad)
BLM18 [mm] "MURATA, Chip Ferrite Bead, 2-Leads, Body 1.6x0.8mm, Height 0.95mm, Flow"
  rect 0.95x0.7 smd: 1(0,0) 2(1.65,0)
  body extent 0.02,-0.4 1.63,0.4, height 0.95
C0603 [mm] "Chip Capacitor, Body 1.6x0.8mm, Height 1.0mm, IPC Medium Density"
  rect 0.9x1 smd: 1(0,0) 2(1.6,0)
  silkscreen extent 0.75,-0.4 0.85,0.4, body extent -0.08,-0.48 1.68,0.47, height 1
C0805 [mm] "Chip Capacitor, 2-Leads, Body 2.00x1.25mm, IPC Medium Density"
  rect 1.25x1.45 smd: 1(0,0) 2(1.7,0)
  body extent -0.23,-0.7 1.92,0.7, height 1.4
C1206(3216) [mm] "Chip Capacitor, Body 3.2x1.6mm, Height 1.1mm, IPC Medium Density"
  rect 1.15x1.8 smd: 1(0,0) 2(3,0)
  silkscreen extent 0.95,-0.8 2.05,0.8, body extent -0.2,-0.9 3.2,0.9, height 1.1
C1210 [mm] "Chip Capacitor, 2-Leads, Body 3.5x2.7mm, IPC Medium Density"
  rect 1.15x2.8 smd: 1(0,0) 2(3.45,0)
  silkscreen extent 0.97,-1.3 2.47,1.3, body extent -0.03,-1.35 3.47,1.35, height 2.7
C2220 [mm] "Chip Capacitor, Body 5.7x5.0mm, Height 2.3mm, IPC Medium Density"
  rect 1.55x5.4 smd: 1(0,0) 2(5.25,0)
  silkscreen extent 1.17,-2.6 4.08,2.6, body extent -0.43,-2.7 5.68,2.7, height 2.3
DO-214AC-2_N [mm] "DO-214AC, 2-Leads, Body 4.5x2.79mm, IPC Medium Density"
  rect 2.4x1.55 smd: 1(-1.525,0) 2(1.525,0)
  silkscreen extent -3.4,-1.4 2.25,1.4, body extent -2.25,-1.4 2.25,1.39, height 2.29
DST210A [mm]
  rect 0.85x1.4 smd: 1(-0.675,0) 2(0.675,0)
  silkscreen extent -1.35,-0.92 1.35,0.92, body extent -0.9,-0.6 0.9,0.6, height 0.5
DWM1000 [mm]
  rect 2.45x1 smd: 1(0.205,12.3) 2(0.205,10.9) 3(0.205,9.5) 4(0.205,8.1) 5(0.205,6.7) 6(0.205,5.3) 7(0.205,3.9) 8(0.205,2.5) 17(12.795,2.5) 18(12.795,3.9) 19(12.795,5.3) 20(12.795,6.7) 21(12.795,8.1) 22(12.795,9.5) 23(12.795,10.9) 24(12.795,12.3)
  rect 1x2.45 smd: 9(1.6,0.205) 10(3,0.205) 11(4.4,0.205) 12(5.8,0.205) 13(7.2,0.205) 14(8.6,0.205) 15(10,0.205) 16(11.4,0.205)
  body extent 0,-0.01 13,22.99, height 2.9
FSMSM-2 [mm] "Switch SMD, 2-Leads, Body 6x3.5mm, Pitch 9.19mm"
  rect 2.2x1.6 smd: 1(-4.595,0)
  rect 2.18x1.6 smd: 2(4.595,0)
  silkscreen extent -6.37,-1.75 3,1.75, body extent -4.98,-1.75 4.98,1.75, height 4.4
H2019NL [mm]
  rect 2.035x0.76 smd: 1(-4.062,4.445) 2(-4.062,3.175) 3(-4.062,1.905) 4(-4.062,0.635) 5(-4.062,-0.635) 6(-4.062,-1.905) 7(-4.062,-3.175) 8(-4.062,-4.445) 9(4.062,-4.445) 10(4.062,-3.175) 11(4.062,-1.905) 12(4.062,-0.635) 13(4.062,0.635) 14(4.062,1.905) 15(4.062,3.175) 16(4.062,4.445)
  silkscreen extent -6.2,-6.35 4.4,6.35, body extent -3.68,-6.35 3.68,6.35, height 6
HR911105A [mm] "HANRUN RJ45"
  rect 1.398x1.398 hole 0.89: 1(0,0)
  round 1.398 hole 0.89: 2(1.27,2.54) 3(2.54,0) 4(3.81,2.54) 5(5.08,0) 6(6.35,2.54) 7(7.62,0) 8(8.89,2.54)
  round 1.53 hole 1.02: 9(-2.175,-11.25) 10(0.365,-11.25) 11(8.535,-11.25) 12(11.075,-11.25)
  round 2.445 hole 1.63: 13(-3.295,-3.3) 14(12.195,-3.3)
  round 3.25 hole 3.25 unplated: None(-1.265,-6.35) None(10.165,-6.35)
  silkscreen extent -4.7,-17.27 12.45,4.13, body extent -3.49,-17.28 12.39,4.12, height 13.5
HTSSOP16 [mm] "TSOP, 16-Leads, Body 5x4.4mm, Pitch 0.65mm, Thermal Pad 3x3mm, IPC Medium Density"
  oval 1.7x0.35 smd: 1(-2.85,2.275) 2(-2.85,1.625) 3(-2.85,0.975) 4(-2.85,0.325) 5(-2.85,-0.325) 6(-2.85,-0.975) 7(-2.85,-1.625) 8(-2.85,-2.275) 9(2.85,-2.275) 10(2.85,-1.625) 11(2.85,-0.975) 12(2.85,-0.325) 13(2.85,0.325) 14(2.85,0.975) 15(2.85,1.625) 16(2.85,2.275)
  rect 3x3 smd paste-1.5: 17(0,0)
  silkscreen extent -2.97,-2.55 1.6,3.12, body extent -2.25,-2.55 2.25,2.55, height 1.2
IND2220 [mil] "SMD, 2-Leads"
  rect 95x135 smd: 1(0,0) 2(230,0)
  silkscreen extent -20,-118 250,118, body extent 3,-98 227,98, height 185
JS202011SCQN [mm] "Switch, SMD, 6-Leads, Body 9x3.6mm, Pitch 2.5mm"
  rect 1.2x2.5 smd: 1(-2.5,-2.75) 2(0,-2.75) 3(2.5,-2.75) 4(-2.5,2.75) 5(0,2.75) 6(2.5,2.75)
  silkscreen extent -4.5,-4.67 4.5,1.8, body extent -4.5,-1.8 4.5,1.8, height 5.5
LED0805 [mm] "Chip LED, 2-Leads, Body 2.0x1.3mm, IPC Medium Density"
  rect 1.1x1.2 smd: 1(-1.05,0) 2(1.05,0)
  silkscreen extent -0.15,-0.5 0.15,0.5, body extent -1,-0.62 1,0.63, height 0.68
ME3220 [mm]
  rect 1.5x3 smd: 1(0,0) 2(2.5,0)
  silkscreen extent 0,-1.7 2.5,1.7, body extent -0.5,-1.4 3,1.4, height 2.4
NX3225 [mm]
  rect 1.4x1.2 smd: 1(-1.1,-0.8) 2(1.1,-0.8) 3(1.1,0.8) 4(-1.1,0.8)
  silkscreen extent -2.1,-1.35 -2,-1.25, body extent -1.65,-1.3 1.65,1.3, height 0.9
PLD1.27-10S [mm] "Socket Header, Pitch 1.27 mm, SMT, Vertical, dual row, 10p"
  rect 0.74x1.7 smd: 1(0,0) 2(0,-4.1) 3(1.27,0) 4(1.27,-4.1) 5(2.54,0) 6(2.54,-4.1) 7(3.81,0) 8(3.81,-4.1) 9(5.08,0) 10(5.08,-4.1)
  silkscreen extent -0.98,-3.68 6.06,-0.43, body extent -0.84,-4.35 5.91,0.25, height 4.6
POE30P [mil]
  rect 80x50 smd: 1(0,0) 2(0,98) 3(0,196) 4(0,294) 5(370,294) 6(370,196) 7(370,98) 8(370,0)
  silkscreen extent -28,-96 -12,-81, body extent -67,-67 453,363, height 355
PowerJack [mm] "Power Jack, 3-Leads, Body 14.5x9mm"
  rrect50% 1.3x4 hole 0.8 slot 3.5 at 90 deg: 1(-6.2,0)
  rrect50% 1.3x3.5 hole 0.8 slot 3 at 90 deg: 2(0,0)
  rrect50% 3.5x1.3 hole 0.8 slot 3 at 0 deg: 3(-3,4.7)
  silkscreen extent -7.53,-4.5 7.7,4.5, body extent -6.8,-4.5 7.7,4.9, height 10.8
QFN-16 [mm] "QFN, 16-Leads, Body 3x3mm, Pitch 0.5mm, Thermal Pad 1.65x1.65mm"
  rrect40% 0.6x0.25 smd: 1(-1.4,0.75) 2(-1.4,0.25) 3(-1.4,-0.25) 4(-1.4,-0.75) 9(1.4,-0.75) 10(1.4,-0.25) 11(1.4,0.25) 12(1.4,0.75)
  rrect40% 0.25x0.6 smd: 5(-0.75,-1.4) 6(-0.25,-1.4) 7(0.25,-1.4) 8(0.75,-1.4) 13(0.75,1.4) 14(0.25,1.4) 15(-0.25,1.4) 16(-0.75,1.4)
  rrect6% 1.7x1.7 smd paste-0.85: 17(0,0)
  silkscreen extent -2.35,-1.57 1.57,1.58, body extent -1.5,-1.5 1.5,1.5, height 1
QFN-24 [mm] "QFN, 24-Leads, Body 4.1x4.1mm, Pitch 0.5mm, Thermal Pad 2.50x2.50mm"
  oval 0.69x0.28 smd: 1(-1.882,1.25) 2(-1.882,0.75) 3(-1.882,0.25) 4(-1.882,-0.25) 5(-1.882,-0.75) 6(-1.882,-1.25) 13(1.883,-1.25) 14(1.883,-0.75) 15(1.883,-0.25) 16(1.883,0.25) 17(1.883,0.75) 18(1.883,1.25)
  oval 0.28x0.69 smd: 7(-1.25,-1.882) 8(-0.75,-1.882) 9(-0.25,-1.882) 10(0.25,-1.882) 11(0.75,-1.882) 12(1.25,-1.882) 19(1.25,1.883) 20(0.75,1.883) 21(0.25,1.883) 22(-0.25,1.883) 23(-0.75,1.883) 24(-1.25,1.883)
  rect 2.5x2.5 smd paste-2: 25(0,0)
  silkscreen extent -2.97,-2.2 2.2,2.2, body extent -2.05,-2.05 2.05,2.05, height 1
R1206(3216) [mm] "Chip Resistor, Body 3.2x1.6mm, IPC Medium Density"
  rect 1.15x1.8 smd: 1(-1.45,0) 2(1.45,0)
  silkscreen extent -0.5,-0.8 0.5,0.8, body extent -1.67,-0.87 1.67,0.87, height 0.75
S2B-PH-K-S [mm] "THD, 2-Leads, Body 7.6x5.9mm, Pitch 2mm"
  rect 1.2x1.2 hole 0.7: 1(-1,2.45)
  round 1.2 hole 0.7: 2(1,2.45)
  silkscreen extent -2.95,-3.8 2.95,4.35, body extent -2.95,-3.8 2.95,3.8, height 4.8
SDIP-4 [mm] "SMD, 4-Leads, Body 8.28x6.35mm, Pitch 5.1mm"
  rect 1.3x1.5 smd: 1(0,0) 2(5.1,0) 3(5.1,8.9) 4(0,8.9)
  silkscreen extent -1.59,-1.42 6.69,7.63, body extent -1.59,1.28 6.69,7.63, height 2.84
SFH6156(VISH) [mm] "SMD, 4-Leads, Body 6.645x4.69mm, Pitch 2.54mm"
  rect 1.525x1.78 smd: 1(-4.763,1.27) 2(-4.763,-1.27) 3(4.763,-1.27) 4(4.763,1.27)
  silkscreen extent -4.89,-2.34 3.32,2.83, body extent -3.32,-2.34 3.32,2.34, height 4.06
SMB-2 [mm] "Molded, 2-Leads, Body 4.6x3.95mm"
  rect 2.159x2.743 smd: 1(-2.21,0) 2(2.21,0)
  silkscreen extent -3.16,-2 2.3,2.05, body extent -2.3,-1.97 2.3,1.97, height 2.47
SMD0603 [mm] "Chip Resistor, Body 1.6x0.8mm, IPC Medium Density"
  rect 0.9x1 smd: 1(-0.8,0) 2(0.8,0)
  silkscreen extent -1.52,-0.76 1.52,0.76, body extent -0.85,-0.47 0.85,0.47, height 0.6
SMD0805 [mm] "Chip Resistor, Body 2.0x1.3mm, IPC Low Density"
  rect 1.25x1.5 smd: 1(0,0) 2(2,0)
  silkscreen extent -0.9,-1.1 3,1.1, body extent -0.05,-0.67 2.15,0.67, height 0.7
SOD-323-2 [mm] "SMD, 2-Leads, Body 1.66x1.28mm"
  rect 1.06x0.54 smd: 1(-1.07,0) 2(1.07,0)
  silkscreen extent -0.14,-0.64 2.1,0.64, body extent -0.83,-0.64 0.83,0.64, height 1.17
SON-8 [mm] "SON, 8-Leads, Body 2x2mm, Pitch 0.5mm, Thermal Pad 1.6x0.9mm, TI Recommended"
  rrect40% 0.5x0.25 smd: 1(-0.95,0.75) 2(-0.95,0.25) 3(-0.95,-0.25) 4(-0.95,-0.75) 5(0.95,-0.75) 6(0.95,-0.25) 7(0.95,0.25) 8(0.95,0.75)
  rrect11% 0.9x1.6 smd paste-0.45: 9(0,0)
  silkscreen extent -1.07,-1.15 1.07,1.15, body extent -1.05,-1.05 1.05,1.05, height 0.8
SOP-8 [mm] "SOP, 8-Leads, Body 2.4x2.1mm, Pitch 0.5mm, IPC Medium Density"
  rrect33% 0.8x0.3 smd: 1(-1.6,0.75) 2(-1.6,0.25) 3(-1.6,-0.25) 4(-1.6,-0.75) 5(1.6,-0.75) 6(1.6,-0.25) 7(1.6,0.25) 8(1.6,0.75)
  silkscreen extent -1.72,-1.05 0.8,1.57, body extent -1.56,-1 1.56,1, height 0.9
SOT-23-5 [mm] "SOT23, 5-Leads, Body 3.05x1.75mm, Pitch 0.95mm, IPC Medium Density"
  rrect17% 1x0.6 smd: 1(-1.375,0.95) 2(-1.375,0) 3(-1.375,-0.95) 4(1.375,-0.95) 5(1.375,0.95)
  silkscreen extent -1.5,-1.55 0.5,1.92, body extent -1.42,-1.46 1.42,1.46, height 1.08
SOT-23-6 [mm] "SOT23, 6-Leads, Body 2.9x1.7mm, Pitch 0.95mm, Lead Span 2.8mm, IPC Medium Density"
  rect 1.1x0.65 smd: 1(-1.2,0.95) 2(-1.2,0) 3(-1.2,-0.95) 4(1.2,-0.95) 5(1.2,0) 6(1.2,0.95)
  silkscreen extent -1.32,-1.55 0.25,1.95, body extent -0.9,-1.55 0.9,1.55, height 1.45
SOT-223 [mm] "SOT223, 4-Leads, Body 6.5x3.5mm, Pitch 2.3mm, Lead Span 7mm, IPC Medium Density"
  rect 2.4x1 smd: 1(-2.9,2.3) 2(-2.9,0) 3(-2.9,-2.3)
  rect 2.4x3.3 smd: 4(2.9,0)
  silkscreen extent -3.03,-3.35 1.4,3.47, body extent -1.85,-3.35 1.85,3.35, height 1.8
STM-LGA-24_3500X3000X1000 [mm] "LGA, 24-Leads, Body 3.65x3.15mm, Pitch 0.43mm"
  rect 0.23x0.35 smd mask+0.05: 1(-1.505,1.25) 6(-1.505,-1.25) 7(-1.075,-1.25) 8(-0.645,-1.25) 9(-0.215,-1.25) 10(0.215,-1.25) 11(0.645,-1.25) 12(1.075,-1.25) 13(1.505,-1.25) 18(1.505,1.25) 19(1.075,1.25) 20(0.645,1.25) 21(0.215,1.25) 22(-0.215,1.25) 23(-0.645,1.25) 24(-1.075,1.25)
  rect 0.35x0.23 smd mask+0.05: 2(-1.505,0.645) 3(-1.505,0.215) 4(-1.505,-0.215) 5(-1.505,-0.645) 14(1.505,-0.645) 15(1.505,-0.215) 16(1.505,0.215) 17(1.505,0.645)
  silkscreen extent -2.11,1.19 -1.98,1.31, body extent -1.82,-1.57 1.83,1.58, height 1.03
STM-LQFP100_V [mm] "Thin QFP, 100-Leads, Body 14x14mm, Pitch 0.5mm, ST Recommended"
  rect 1.2x0.3 smd: 1(0,0) 2(0,-0.5) 3(0,-1) 4(0,-1.5) 5(0,-2) 6(0,-2.5) 7(0,-3) 8(0,-3.5) 9(0,-4) 10(0,-4.5) 11(0,-5) 12(0,-5.5) 13(0,-6) 14(0,-6.5) 15(0,-7) 16(0,-7.5) 17(0,-8) 18(0,-8.5) 19(0,-9) 20(0,-9.5) 21(0,-10) 22(0,-10.5) 23(0,-11) 24(0,-11.5) 25(0,-12) 51(15.5,-12) 52(15.5,-11.5) 53(15.5,-11) 54(15.5,-10.5) 55(15.5,-10) 56(15.5,-9.5) 57(15.5,-9) 58(15.5,-8.5) 59(15.5,-8) 60(15.5,-7.5) 61(15.5,-7) 62(15.5,-6.5) 63(15.5,-6) 64(15.5,-5.5) 65(15.5,-5) 66(15.5,-4.5) 67(15.5,-4) 68(15.5,-3.5) 69(15.5,-3) 70(15.5,-2.5) 71(15.5,-2) 72(15.5,-1.5) 73(15.5,-1) 74(15.5,-0.5) 75(15.5,0)
  rect 0.3x1.2 smd: 26(1.75,-13.75) 27(2.25,-13.75) 28(2.75,-13.75) 29(3.25,-13.75) 30(3.75,-13.75) 31(4.25,-13.75) 32(4.75,-13.75) 33(5.25,-13.75) 34(5.75,-13.75) 35(6.25,-13.75) 36(6.75,-13.75) 37(7.25,-13.75) 38(7.75,-13.75) 39(8.25,-13.75) 40(8.75,-13.75) 41(9.25,-13.75) 42(9.75,-13.75) 43(10.25,-13.75) 44(10.75,-13.75) 45(11.25,-13.75) 46(11.75,-13.75) 47(12.25,-13.75) 48(12.75,-13.75) 49(13.25,-13.75) 50(13.75,-13.75) 76(13.75,1.75) 77(13.25,1.75) 78(12.75,1.75) 79(12.25,1.75) 80(11.75,1.75) 81(11.25,1.75) 82(10.75,1.75) 83(10.25,1.75) 84(9.75,1.75) 85(9.25,1.75) 86(8.75,1.75) 87(8.25,1.75) 88(7.75,1.75) 89(7.25,1.75) 90(6.75,1.75) 91(6.25,1.75) 92(5.75,1.75) 93(5.25,1.75) 94(4.75,1.75) 95(4.25,1.75) 96(3.75,1.75) 97(3.25,1.75) 98(2.75,1.75) 99(2.25,1.75) 100(1.75,1.75)
  silkscreen extent -0.13,-12.75 14.5,0.82, body extent 0.75,-13 14.75,1, height 1.6
TECO-1981568-5_V [mm] "SMD, 5-Leads, Body 8x5.9mm, Pitch 0.65mm"
  rect 0.4x1.35 smd: 1(-1.3,0) 2(-0.65,0) 3(0,0) 4(0.65,0) 5(1.3,0)
  rect 1.6x1.4 smd: 6(-3.2,-0.225) 7(3.2,-0.225)
  rect 1.45x1.3 smd: 8(-3.425,-2.675) 9(3.425,-2.675)
  rect 1.9x1.9 smd: 10(-1.2,-2.675) 11(1.2,-2.675)
  silkscreen extent -4,-5 4,1.12, body extent -4,-5.4 4,0.2, height 2.79
TPSA106K010R1800 [mm] "Molded, 2-Leads, Body 3.4x1.8mm, IPC Medium Density(AVX)"
  rect 1.95x1.3 smd: 1(0,0) 2(2.45,0)
  silkscreen extent -1.48,-0.9 -1.48,0.9, body extent -0.37,-0.82 2.83,0.83, height 1.8
VSON-8 [mm] "SON, 8-Leads, Body 3x3mm, Pitch 0.65mm, Thermal Pad 1.50 x 3.8mm"
  rrect29% 0.85x0.35 smd: 1(-1.475,0.975) 2(-1.475,0.325) 3(-1.475,-0.325) 4(-1.475,-0.975) 5(1.475,-0.975) 6(1.475,-0.325) 7(1.475,0.325) 8(1.475,0.975)
  rrect7% 1.5x1.75 smd: 9(0,0)
  1 Top Layer region: 0.185,0.875 0.185,1.9 0.465,1.9 0.465,0.875
  1 Top Layer region: -0.185,-0.875 -0.185,-1.9 -0.465,-1.9 -0.465,-0.875
  1 Top Layer region: 0.185,-0.875 0.185,-1.9 0.465,-1.9 0.465,-0.875
  1 Top Layer region: -0.185,0.875 -0.185,1.9 -0.465,1.9 -0.465,0.875
  silkscreen extent -2.02,-1.58 1.57,1.62, body extent -1.5,-1.5 1.5,1.5, height 1

## Part data
C1 C3 C67 C71: Voltage=25V
C2 C4 C5 C9 C11 C13 C15 C16 C17 C18 C19 C20 C21 C22 C23 C24 C25 C26 C27 C61 C62 C63 C65: Voltage=10V
  C17 C18: Model=CC1206KKX7R6BB225
  C61 C62 C63 C65: Model=GRM21BR61A476ME15L
C6 C28 C29 C30 C31 C32 C33 C34 C35 C36 C37 C38 C39 C40 C44 C60 C64: Voltage=16V
C7 C8 C10 C68 C69 C70 C74 C75 C76 C77 C78: Voltage=50V
C12 C14 C43 C45: Voltage=*V
C41 C42: "CAP TANT 10UF 10% 10V 1206", Voltage=10V, Model=TPSA106K010R0900
C46 C47 C48 C49 C50 C51 C52 C53 C55 C56 C57 C58 C59 C66 C72 C73 C79: Voltage=100V
  C55: Model=08051C104KAT2A
C54 C80: Voltage=2KV
D1 D2 D3 D4 D5 D6: library part BAT60J, "Shottky Diode 10V 3A"
D7: "4-line ESD protection", Manuf_1=STM, Manuf_Part_1=ESDA5V3L, Distrib=ST, ECCN_US/EU=EAR99/NEC, Order=ESDA5V3L, Ordered by=STM, Provided=ST, Ref St=9179034
D8 D9 D10 D11 D12 D13: "LED SMD 0805 K1A2"
D14 D15: "BRIDGE RECT 1P 100V 1.5A 4SDIP"
D16: "TVS DIODE 58V 93.6V DO214AC"
D17: "DIODE SCHOTTKY 40V 2A SMB"
D18 D19: "DIODE SCHOTTKY 100V 150MA SOD323"
FB1 FB2: library part BLM18, "Ferrite Bead 0603", DC Current Rating="* A", Resistance="* Ohm"
L1 L2: "2.2u 2220 3.2A", Model=LQH55PN2R2NR0
L3: "SMT Power Inductor", Model=ME3220-562M
R3 R4 R5 R6 R7 R8 R11 R12 R13: library part R0603
SB1: "SMD Switch 2-Leads"
SW1: "Switch Slide DPDT, 0.3 A, 6 V, -40 to 85 degC, 6-Pin SMD, RoHS, Tape and Reel", Actuator Color=Black, Contact Rating @ Voltage=0.3@6VDCA, Dielectric Strength=500VAC, Manufacturer="C&K Components", Maximum AC Voltage Rating=N/A, Maximum Contact Resistance=70mOhm, Maximum DC Voltage Rating=6V, Minimum Insulation Resistance=100MOhm, Operating Temperature=-40to85C, Actuator Material=Nylon4/6, Actuator Style=TopSlide, Base Material=N/A, Body Orientation=Straight, Contact Material=CopperAlloy, Contact Plating=Silver, COO=US, Datasheet URL=http://datasheet.octopart.com/JS202011SCQN-C%26K-Components-datasheet-62100994.pdf, Datasheet Version=Sep-15, Dimension=9x7.5x5.5mm, ECCN=EAR99, Electrical Life=15000Cycles, Family=JS, Housing Material=Nylon4/6, HTS=8536509050, Manufacturer URL=http://www.ckswitches.com, Mechanical Life=N/A, Mounting=SurfaceMount,GullWing, Packaging=TapeandReel, Part No=JS202011SCQN, Pole Throw Configuration=DPDT, Product Weight=N/A, RoHS=Yes, Seal Description=N/A, Seal Location=N/A, Supplier=C&KComponents, Supplier Standard Pack=5,000, Switch Configuration=N/A, Type=Sub-Miniature
T1: "MODULE XFRMR VOIP SGL LAN 16SOIC", Package="SOIC-16 Pulse", Availability=Unavailable, MF="Pulse Electronics", MP=H2019NL, Price=None, SnapEDA_Link=https://www.snapeda.com/parts/H2019NL/Pulse%20Electronics%20Network/view-part/?ref=snap
T2: "PoE transformer, SMT"
U1: library part TPS62143RGT16, "Buck 2A TI Fix 5V"
U2: library part TPS62162DSG8, "Buck 1A TI Fix 3.3V"
U3: "IC REG LINEAR 3.3V 400MA 8SON"
U5: "FLASH 16M SPI 86MHZ 16SOP"
U6: "MOD IEEE802.15.4-2011 UWB TXRX", Current - Receiving=64mA, Current - Transmitting=31mA, Frequency="3.5GHz ~ 6.5GHz", Manufacturer="Decawave Limited", Operating Temperature="-40°C ~ 85°C", Package / Case=Module, Power - Output=-, Supplier Part Number 1=1479-1002-1-ND, Voltage - Supply="2.8 V ~ 3.6 V", Antenna Type="Integrated, Chip", Category="RF/IF and RFID", ComponentLink1Description=http://www.decawave.com/sites/default/files/product-pdf/dwm1000-product-brief.pdf, ComponentLink1URL=http://www.decawave.com/sites/default/files/product-pdf/dwm1000-product-brief.pdf, Data Rate=6.8Mbps, Manufacturer Part Number=DWM1000, Memory Size=-, Modulation=-, Mounting Type="Surface Mount", Packaging="Cut Tape (CT)", Pricing 1="1=32.16, 10=26.704, 100=24.24, 250=22.51296 (USD)", Protocol=-, RF Family/Standard=802.15.4, RoHS="RoHS Compliant", Sensitivity=-, Serial Interfaces=SPI, Stock 1=1028, Supplier 1=Digi-Key
U7: library part STM-LSM9DS1-24
U8: "RMII 10/100 Eth Transceiver Microchip"
U11: "IC VREF SHUNT ADJ SOT23-5"
VT1: "MOSFET N-CH 200V 1A"
XS2: "Male Header, Pitch 2 mm, 1 x 2 Position, Height 4.8 mm, Tail Length 3.4 mm, -25 to 85 degC, RoHS, Bulk", Capacitance="10 uF", Case\Package=Radial, Max Operating Temperature="85 degC", Min Operating Temperature="-40 degC", Package Quantity=200, Tolerance=20%, Voltage Rating="50 V", ComponentLink1Description=Datasheet, ComponentLink1URL=http://www.jst-mfg.com/product/pdf/eng/ePH.pdf, DatasheetVersion=Dec-12, Diameter="5 mm", Height="11 mm", Lead Pitch="2 mm", Length="11 mm", Mount="Through Hole", PackageDescription="Male Header, Pitch 2 mm, 1 x 2 Position, Height 4.8 mm, Tail Length 3.4 mm", PackageReference=S2B-PH-K-S, Packaging=Bulk, Pins=2, Radiation Hardening=No, REACH SVHC="No SVHC", RoHSCompliant=true, Voltage Rating (DC)="50 V"
XS3: library part "USB-Micro B"
XS4: library part PLD1.27-10-MCU
ZQ1: library part Crystal, "DST210A"
ZQ2 ZQ3: library part Crystal_4, "DSX321G"

## Free pads (board coordinates)
  round 1.524 hole 3.1 unplated: 1(5.25,68.5) 1(16.51,3.81) 1(62.5,3.75) 1(62.5,67.5)
  round 1.524 smd: 2(15.575,26.375) 3(25.6,24.475) 4(45.375,67.85) 6(57.575,69.45) 9(44.4,54.1)
  round 1.27 smd: 8(13.2,14.9)

## Via types
v1: diameter 0.45, hole 0.2, 1 Top Layer to 4 Bottom Layer, tented both sides, 217 vias
v2: diameter 0.7, hole 0.3, 1 Top Layer to 4 Bottom Layer, 11 vias
v3: diameter 0.6, hole 0.2, 1 Top Layer to 4 Bottom Layer, tented bottom, 4 vias
v4: diameter 0.7, hole 0.3, 1 Top Layer to 4 Bottom Layer, tented top, 4 vias
v5: diameter 1, hole 0.5, 1 Top Layer to 4 Bottom Layer, 2 vias
v6: diameter 0.45, hole 0.2, 1 Top Layer to 4 Bottom Layer, 1 vias

## Nets (pads, with @x,y where several pads share a name; then routed paths per layer and width w, separated by ;. In a path a pad name is that pad's centre, name@x,y a point inside that pad or via, vN(x,y) a via of type N, cw(c..) or ccw(c..) an arc to the next point about the centre after c; other vN are vias at no path point)
3V3: C11.2 C20.2 C21.2 C22.2 C23.2 C24.2 C25.2 C26.2 C27.1 C28.1 C29.1 C30.1 C31.1 C34.1 C35.1 C36.1 C42.1 C44.1 FB1.2 FB2.2 R7.2 R9.2 R10.2 R14.2 R15.2 R16.2 R17.2 R18.2 R19.2 R20.2 R21.2 R22.2 SW1.2 SW1.5 U4.6 U4.11 U4.19 U4.28 U4.50 U4.75 U4.100 U5.8 U6.5 U6.6 U6.7 U7.1 U7.3 U7.22 U7.23 U8.9 XS4.8 | length 296.3
  1 Top Layer w0.254: XS4.8@24.003,8.738 24.003,7.468 24.181,7.29 v1(31.115,7.29) 32.969,7.29 v1@32.995,7.264 ; v1(32.9,7.2) 32.93,7.2 v1@32.995,7.264 ; v1@33,7.27 v1@32.995,7.264 ; C21.2@35.75,8.167 35.75,8.169 35.811,8.23 36.39,8.23 37.152,8.992 37.962,8.992 37.962,7.377 37.998,7.341 v1(37.998,7.315) ; U4.50@39.684,22.8 U4.50@39.7,22.784 ; v1(39.726,21.082) 39.726,22.758 U4.50@39.7,22.784 ; U4.50@39.726,22.809 U4.50@39.7,22.784 ; C22.2@50.125,24.925 50.257,24.793 50.257,24.193 50.712,23.738 U4.28@50.712,22.743 ; C25.2@51.664,5.537 51.712,5.586 U4.100@51.712,7.243 ; 52.854,11.5 51.771,11.5 51.3,11.971 51.3,13.5 51.793,13.993 U4.11@53.462,13.993 53.469,14 54.707,14 55.118,13.589 C26.2@56.21,13.589 ; U4.19@53.462,17.993 54.264,17.993 55.397,19.126 55.397,21.234 55.677,21.514 56.21,21.514 56.464,21.768 C23.2@56.464,22.708 ; U4.6@53.581,11.493 54.42,11.493 54.661,11.252 54.661,9.093 54.94,8.814 C20.2@55.778,8.814
  1 Top Layer w0.508: FB2.2@32.75,54.25 32.75,54.198 32.846,54.102 C42.1@34.9,54.102 ; C44.1@34.9,55.75 C42.1@34.9,54.102 ; C42.1@34.925,54.026 34.9,54.051 C42.1@34.9,54.102 ; C42.1@35.458,54.102 C42.1@34.9,54.102 ; C42.1@35.56,53.721 35.56,52.19 36.3,51.45 39.275,51.45 39.975,52.15 39.975,54.325 40.225,54.575 41.275,54.575 v1(41.3,54.6) ; C24.2@37.744,22.759 37.795,22.809 U4.50@39.6,22.809 ; v1(42.266,26.365) 42.291,26.391 50.075,26.391 ; C22.2@50.075,25.314 50.075,26.391 ; U4.100@51.841,7.214 54.585,7.214 ; C27.1@53.75,5.35 53.534,5.35 53.772,5.588 53.772,6.401 54.585,7.214 ; 53.772,27.254 52.908,26.391 50.075,26.391 ; FB1.2@54.864,24.764 54.864,26.162 ; R9.2@54.966,42.134 55,42.169 54.99,42.178 55,42.188 v1@55,44.39 ; v1@54.991,44.399 54.299,44.399 53.823,43.923 53.823,27.305 54.864,26.264 56.464,26.264 ; v1(55,44.4) v1@56.737,44.4 ; C20.2@55.778,8.839 55.778,8.814 55.778,7.391 55.804,7.366 ; C23.2@56.464,22.708 56.464,26.264 ; R10.2@56.769,41.643 v1@56.769,44.368 ; v1(56.8,44.4) 61.747,44.399 61.773,44.425 C28.1@61.797,44.4 ; C28.1@61.75,44.4 C28.1@61.797,44.4 ; R7.2@61.823,13.665 61.838,13.651 62.738,13.651 62.789,13.6 ; C28.1@61.849,44.399 61.824,44.374 C28.1@61.797,44.4 ; U6.7@63.449,41.427 63.25,41.627 C29.1@63.25,44.4 ; U6.6@64.8,41.34 64.8,44.302 C30.1@64.821,44.323 ; U6.5@66.243,41.377 66.25,41.383 C31.1@66.25,44.4 ; C31.1@66.243,44.45 66.193,44.4 C30.1@64.75,44.4 C29.1@63.25,44.4 ; 54.585,7.214 61.773,7.214 62.789,8.23 62.789,13.6 ; 56.464,26.264 60.3,26.264 60.858,25.705 60.858,19.38 62.789,17.45 62.789,13.6 ; C28.1@61.797,44.4 C29.1@63.25,44.4
  2 Signal Layer w0.254: v1(38.3,60.5) 38.246,60.5 38.183,60.437 42.026,60.437 42.625,59.839 v1(42.625,59.375)
  4 Bottom Layer w0.178: 31.975,8.877 32.347,8.877 32.633,8.592 32.633,8.05
  4 Bottom Layer w0.203: U7.23@32.633,7.675 32.633,7.449 v1@32.906,7.175 ; C34.1@33.063,6.367 U7.22@33.063,7.7 ; U8.9@37.218,60.478 37.233,60.463 38.263,60.463 v1@38.278,60.478
  4 Bottom Layer w0.254: C36.1@30.15,7.823 31.14,7.823 ; v1(31.115,7.29) 31.115,7.798 31.14,7.823 ; U7.1@31.677,7.823 31.14,7.823 ; C34.1@33.045,6.35 C34.1@33.063,6.367 ; R17.2@34.183,55.708 34.3,55.831 34.385,55.919 34.4,55.935 34.466,56.004 R17.2@34.466,55.999 ; U8.9@37.189,60.448 U8.9@37.218,60.478 ; v1@38.278,60.478 v1(38.3,60.5) ; C11.2@42.113,8.509 42.125,8.521 U5.8@42.125,9.83
  4 Bottom Layer w0.508: C35.1@30.023,9.246 30.023,7.95 C36.1@30.074,7.899 ; C36.1@30.099,7.925 C36.1@30.074,7.899 ; C36.1@30.15,7.823 C36.1@30.074,7.899 ; R17.2@34.3,55.831 R17.2@34.3,56 ; R14.2@34.325,64.475 R15.2@34.325,65.975 ; R15.2@34.375,65.925 34.375,67.125 35.325,68.075 41.75,68.075 42.625,67.2 v1(42.625,59.375) 42.625,58.42 ; R16.2@34.4,54.1 R16.2@34.4,54.104 ; R17.2@34.4,55.935 R16.2@34.4,54.104 ; v1(39.726,21.082) 39.776,21.082 42.266,23.571 ; v1@40.425,54.597 41.297,54.597 v1(41.3,54.6) 41.925,54.6 42.625,55.3 42.625,56.86 ; v1(40.425,54.6) 40.125,54.3 R22.2@36.4,54.3 34.596,54.3 R16.2@34.4,54.104 ; R21.2@40.805,56.896 42.589,56.896 42.625,56.86 ; R20.2@40.805,58.42 42.625,58.42 ; R18.2@40.805,61.468 42.525,61.468 ; R19.2@40.805,62.992 42.575,62.992 ; U5.8@41.986,9.779 40.615,9.779 40.589,9.804 40.564,9.804 40.488,9.881 ; v1(42.266,26.365) 42.266,23.571 ; 42.65,67.225 43.625,68.2 49.58,68.2 50.063,67.716 SW1.5@50.063,65.481 ; SW1.2@50.038,60.369 50.038,56.54 50.578,56 53.7,56 54.2,55.5 54.2,45.1 54.9,44.4 v1(55,44.4) v1(56.8,44.4) ; SW1.2@50.038,60.579 SW1.5@50.038,65.481 ; C36.1@30.074,7.899 30.023,7.849 C36.1@30.023,7.798 30.023,4.115 30.658,3.48 36.703,3.48 37.363,4.14 37.363,6.68 v1(37.998,7.315) 39.954,7.315 40.488,7.849 40.488,9.881 ; 40.488,9.881 40.488,13.64 42.266,15.418 42.266,23.571 ; 42.625,56.86 42.625,58.42
3V3_BAT: C7.2 C8.2 C9.2 pad.6 SW1.1 SW1.4 U3.1 | length 20
  1 Top Layer w0.254: C9.2@52.121,64.541 53.609,64.541 U3.1@53.625,64.525
  1 Top Layer w0.508: C7.2@51.714,66.269 53.581,66.269 C8.2@53.625,66.225 ; C8.2@53.594,66.192 53.594,64.731 53.6,64.725 ; C8.2@53.696,66.345 v1(54.839,66.345) ; v1(57.575,67.975) pad.6@57.575,69.45
  4 Bottom Layer w0.508: SW1.1@52.502,60.02 52.538,60.056 SW1.1@52.538,60.369 SW1.4@52.538,65.869 52.538,66.075 52.884,66.421 52.96,66.345 v1(54.839,66.345) 54.839,67.289 55.525,67.975 v1(57.575,67.975)
3V3_IN: C5.2 L2.2 pad.4 R2.2 SW1.3 SW1.6 | length 122.5
  1 Top Layer w0.508: v1(2.896,14.707) v1(2.896,13.411) 2.896,13.404 v1@2.9,13.4 ; v1@2.9,14.7 L2.2@2.9,17.1 ; v1@2.921,13.36 3.277,13.005 4.445,13.005 R2.2@4.45,13 ; L2.2@3,17.5 3,20.8 1.499,22.301 1.499,69.748 2.286,70.536 46.457,70.536 47.523,69.469 47.523,67.85 ; pad.4@45.375,67.85 47.523,67.85 ; v1(47.5,62.7) v1(47.5,63.3) v1(47.5,63.9) 47.5,67.827 47.523,67.85
  4 Bottom Layer w0.508: v1(2.896,13.411) 3.251,13.056 C5.2@4.726,13.056 ; v1@2.896,13.46 v1(2.896,14.707) ; SW1.3@47.523,60.528 47.538,60.543 47.538,63.9 SW1.6@47.538,65.869
5V: C4.2 D1.2 D3.2 D6.2 U2.2 U2.3 | length 26.9
  1 Top Layer w0.254: C4.2@8.525,10.187 U2.2@8.525,11.584 ; C4.2@8.992,10.262 9.025,10.295 U2.3@9.025,11.684 ; C4.2@9.222,9.601 C4.2@9.276,9.547 ; D6.2@11.802,9.779 D6.2@11.96,9.62
  1 Top Layer w0.508: C4.2@9.068,9.855 9.144,9.779 D6.2@11.802,9.779 ; D6.2@11.938,9.598 12.698,9.598 13.5,10.4 15.861,10.4 v1(16.027,10.566) 21.971,10.566 22.504,11.1 D1.2@22.504,20.244
  4 Bottom Layer w0.508: D3.2@16.027,9.881 v1(16.027,10.566)
5V_POE: C61.2 C62.2 C63.2 C64.1 D1.1 pad.3 R41.2 R46.2 R54.1 | length 64.6
  1 Top Layer w0.254: D1.1@22.5,22.32 D1.1@22.5,22.331 ; 22.5,25.319 22.543,25.362
  1 Top Layer w0.508: 22.5,25.319 22.5,22.331 D1.1@22.504,22.327 ; 22.53,25.375 23.19,26.035 25.6,26.035 ; pad.3@25.6,24.475 25.6,26.035 ; v1(29.616,26.035) 25.6,26.035 ; v1(38.837,28.854) 38.837,34.671 39.522,35.357 41.986,35.357 42.824,36.195 R46.2@42.824,41.402 ; R41.2@40.31,41.402 40.316,41.409 R46.2@42.697,41.409 44.584,41.409 45.125,41.95 45.125,44.375 45.85,45.1 v1(49.425,45.1)
  4 Bottom Layer w0.508: v1(29.616,26.035) 29.616,24.968 30.302,24.282 35.763,24.282 34.925,25.121 C62.2@34.925,26.162 C62.2@34.976,26.162 ; C64.1@31.293,26.01 31.267,26.035 C64.1@31.115,26.035 31.115,24.943 31.75,24.308 ; C63.2@32.893,26.162 32.893,24.917 33.477,24.333 ; C61.2@34.847,29.972 35.196,29.623 35.909,29.623 36.652,28.88 ; 35.814,24.282 36.652,25.121 36.652,28.88 ; v1(38.837,28.854) 38.735,28.854 38.71,28.88 36.652,28.88 ; v1(49.425,45.1) 50.8,45.1 R54.1@50.85,45.15
Chassis: C46.1 C53.2 C54.1 R61.1 XS5.13 XS5.14 | length 33.6
  1 Top Layer w0.508: C53.2@15.525,46.325 v1(15.525,47.875)
  3 GND Layer w0.508: XS5.14@11.686,49.322 14.878,49.322 15.525,48.675 v1(15.525,47.875) ; XS5.14@11.686,49.579 XS5.14@11.76,49.505
  4 Bottom Layer w0.508: R61.1@9.779,57.029 R61.1@9.75,57 11.686,57 ; 11.684,60.96 XS5.13@11.684,64.897 ; XS5.14@11.686,49.322 11.686,57 ; XS5.13@11.811,64.897 11.686,64.772 11.686,57 ; C46.1@15.525,45.925 C46.1@15.75,45.7 ; C46.1@15.525,45.975 v1(15.525,47.875) 15.525,49.525 15.9,49.9 16.517,49.9 16.7,49.717 C54.1@16.7,49.9
DWM_CS: U4.29 U6.17 | length 23.1
  1 Top Layer w0.254: U4.29@50.212,22.743 50.216,22.739 50.216,21.781 50.4,21.597 v1@50.4,19.9 ; U6.17@62.052,28.804 62.1,28.756 v3(62.1,22)
  4 Bottom Layer w0.254: v1@50.5,20.056 50.5,21.5 51.012,22.013 51.1,22.1 62,22.1 v3(62.1,22)
  other v1: 50.4,19.9
DWM_MISO: U4.31 U6.19 | length 27.8
  1 Top Layer w0.254: v1@49.225,19.888 49.145,19.969 49.145,21.13 49.225,21.21 U4.31@49.225,22.504 ; v3(64.795,19.482) 64.795,21.04 64.8,21.036 U6.19@64.8,28.75
  4 Bottom Layer w0.254: v1(49.2,19.8) 49.339,19.8 49.839,19.3 64.614,19.3 v3(64.795,19.482)
DWM_MOSI: U4.91 U6.18 | length 41.6
  1 Top Layer w0.254: U4.91@47.219,7.188 47.2,7.17 47.2,5.5 v1(47.4,5.3) ; U6.18@63.4,28.75 63.678,28.472 v3(63.678,7.798)
  4 Bottom Layer w0.254: v1(47.4,5.3) 47.4,7.4 47.823,7.823 v3@63.652,7.823
DWM_RXLED: R12.2 U6.13 | length 13.4
  1 Top Layer w0.254: v1(56.54,34.392) 56.578,34.354 56.705,34.354 56.714,34.345 U6.13@59.705,34.345
  4 Bottom Layer w0.254: R12.2@49.301,38.583 49.327,38.557 49.327,36.523 51.458,34.392 v1(56.54,34.392)
DWM_RXOKLED: R11.2 U6.15 | length 18.5
  1 Top Layer w0.254: v1(56.4,31.9) 56.4,31.713 56.568,31.545 U6.15@59.705,31.545
  4 Bottom Layer w0.254: R11.2@47.371,38.659 47.371,33.329 48.803,31.897 48.806,31.9 v1(56.4,31.9)
DWM_SCK: U4.30 U6.20 | length 25.7
  1 Top Layer w0.254: U4.30@49.712,22.743 49.708,22.739 49.708,21.492 49.8,21.4 v1@49.8,21.015 ; v3@66.2,22.733 U6.20@66.2,28.75
  4 Bottom Layer w0.254: v1(49.7,20.9) 49.7,22.014 50.486,22.8 66.1,22.8 v3(66.167,22.733)
DWM_TXLED: R13.2 U6.12 | length 11
  1 Top Layer w0.254: v1(56.566,35.763) 56.584,35.745 U6.12@59.705,35.745
  4 Bottom Layer w0.254: R13.2@51.232,38.862 51.232,36.768 52.237,35.763 v1(56.566,35.763)
E5V: C2.2 D2.1 L1.2 pad.8 R1.2 U1.14 | length 23.9
  1 Top Layer w0.254: C2.2@14.287,16.815 C2.2@14.349,16.876 ; v1(16.388,16.887) 16.8,16.9 17.4,16.9 17.75,16.55 U1.14@17.75,15.65
  1 Top Layer w0.508: v1(11.5,21.1) 11.5,17.188 11.481,17.169 11.835,16.815 C2.2@14.287,16.815 ; pad.8@13.2,14.9 13.2,16.304 13.521,16.625 C2.2@14.1,16.625 ; C2.2@15.041,16.675 v1(15.041,18.409) ; 15.55,16.887 v1(16.388,16.887)
  4 Bottom Layer w0.508: v1(11.5,21.1) 11.5,19.981 11.481,19.962 11.684,19.759 L1.2@11.6,19.675 ; L1.2@12.75,19.25 13.591,18.409 v1(15.041,18.409) ; D2.1@15.93,11.75 16.1,11.92 16.1,16.6 v1(16.388,16.887)